# EAGLE board Parallel CS Prototype V2 pick & place ident (EAGLE 7.2.0), part 1 of 2
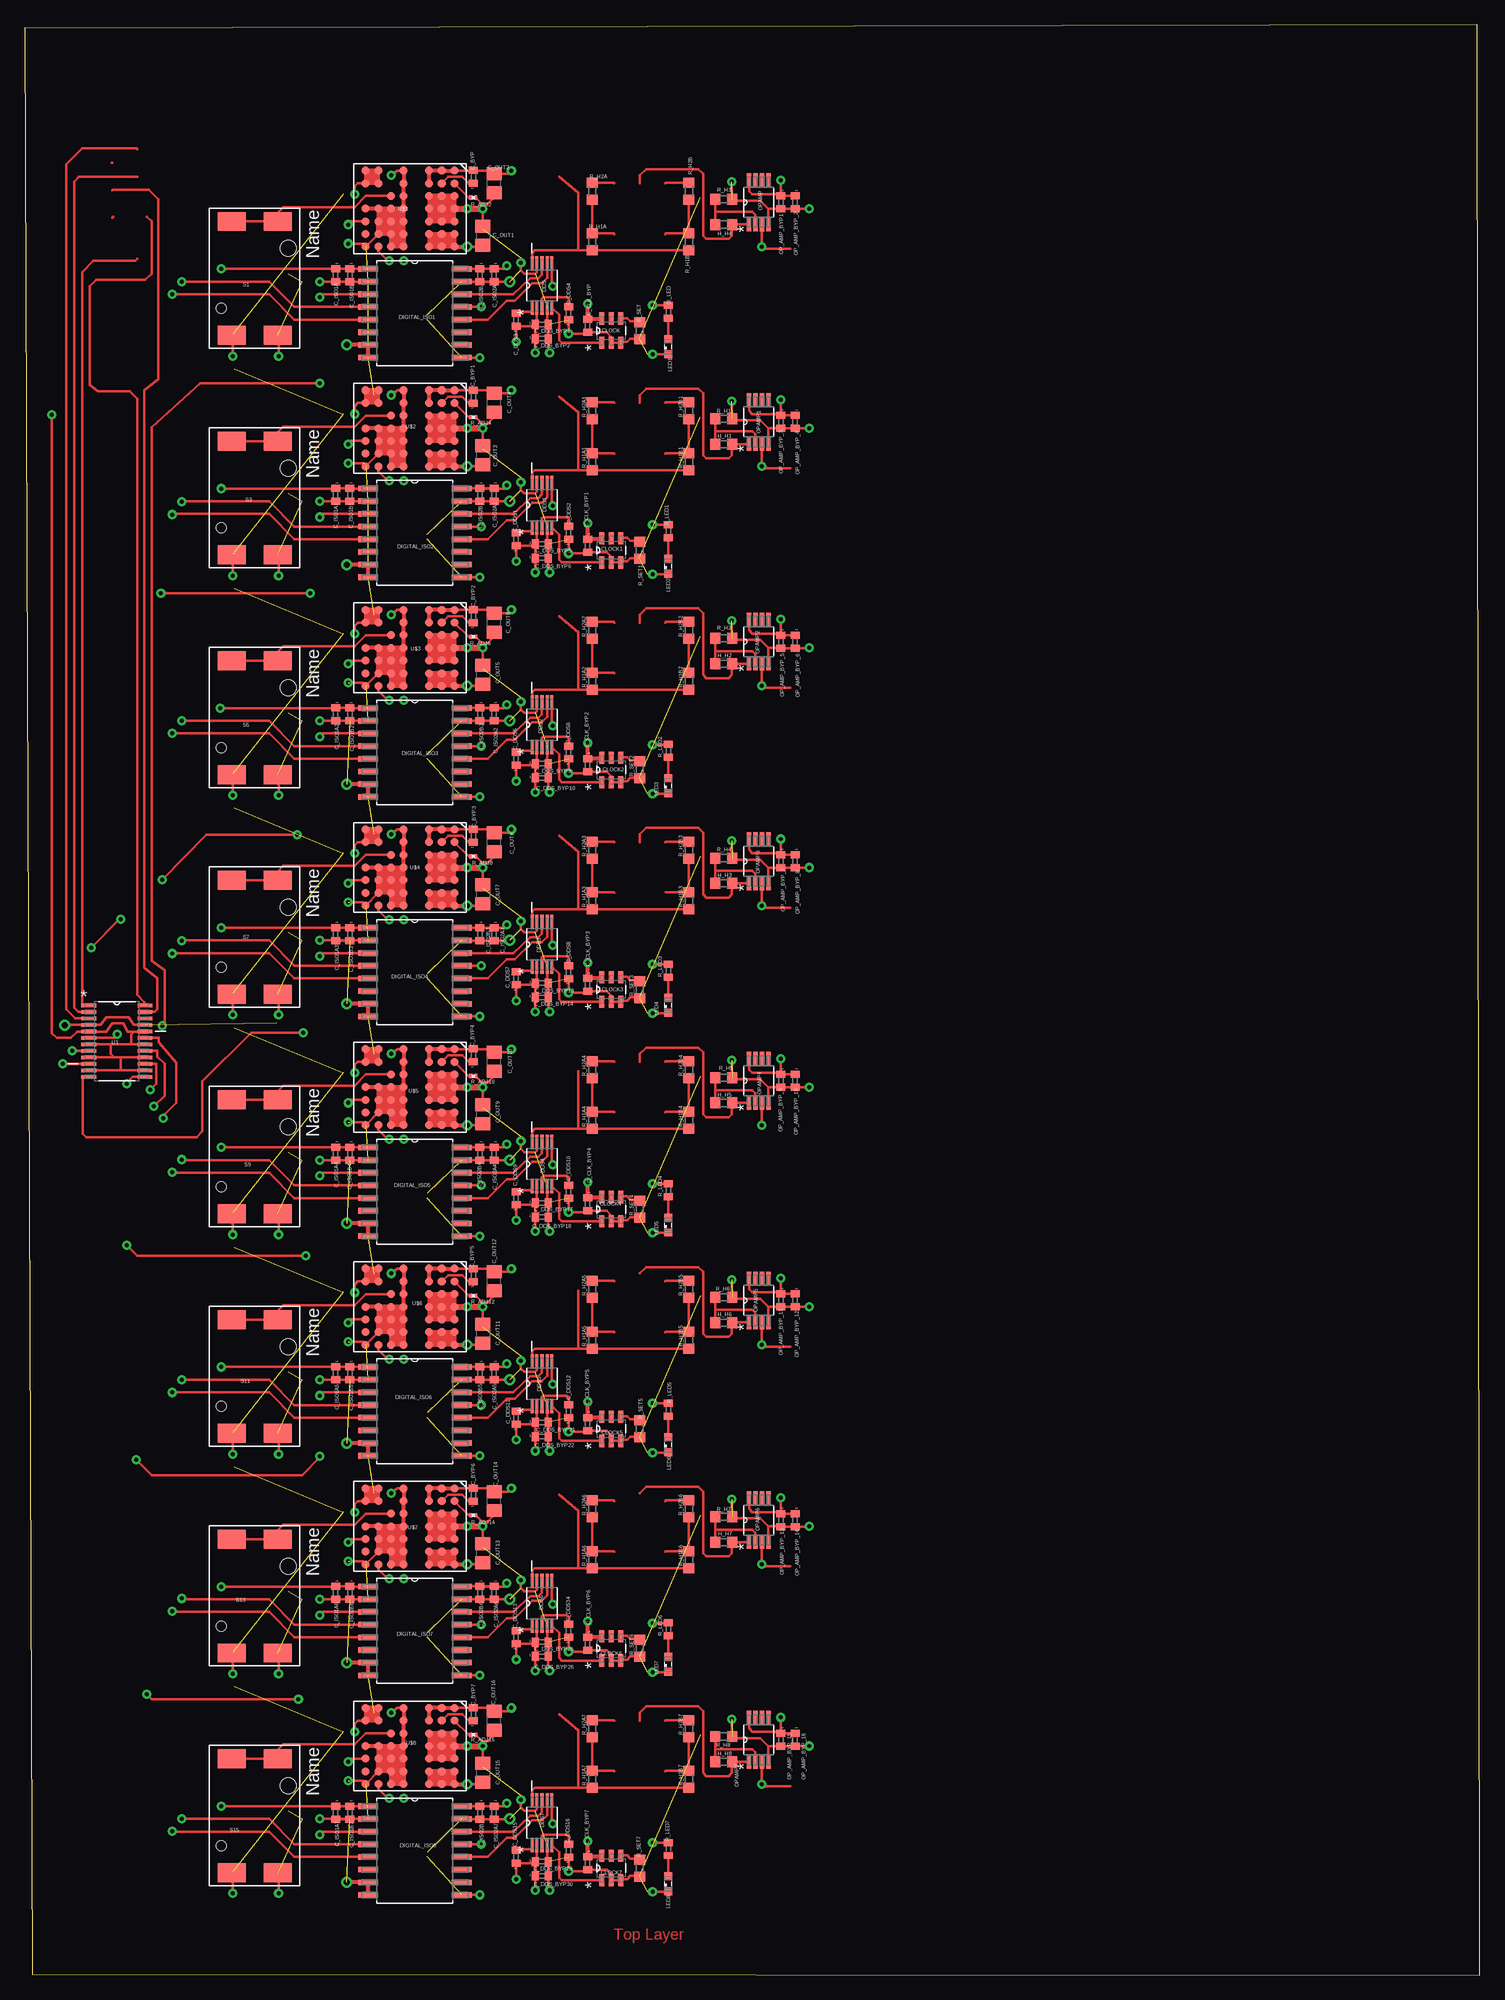
[diagram p0: board, top side]
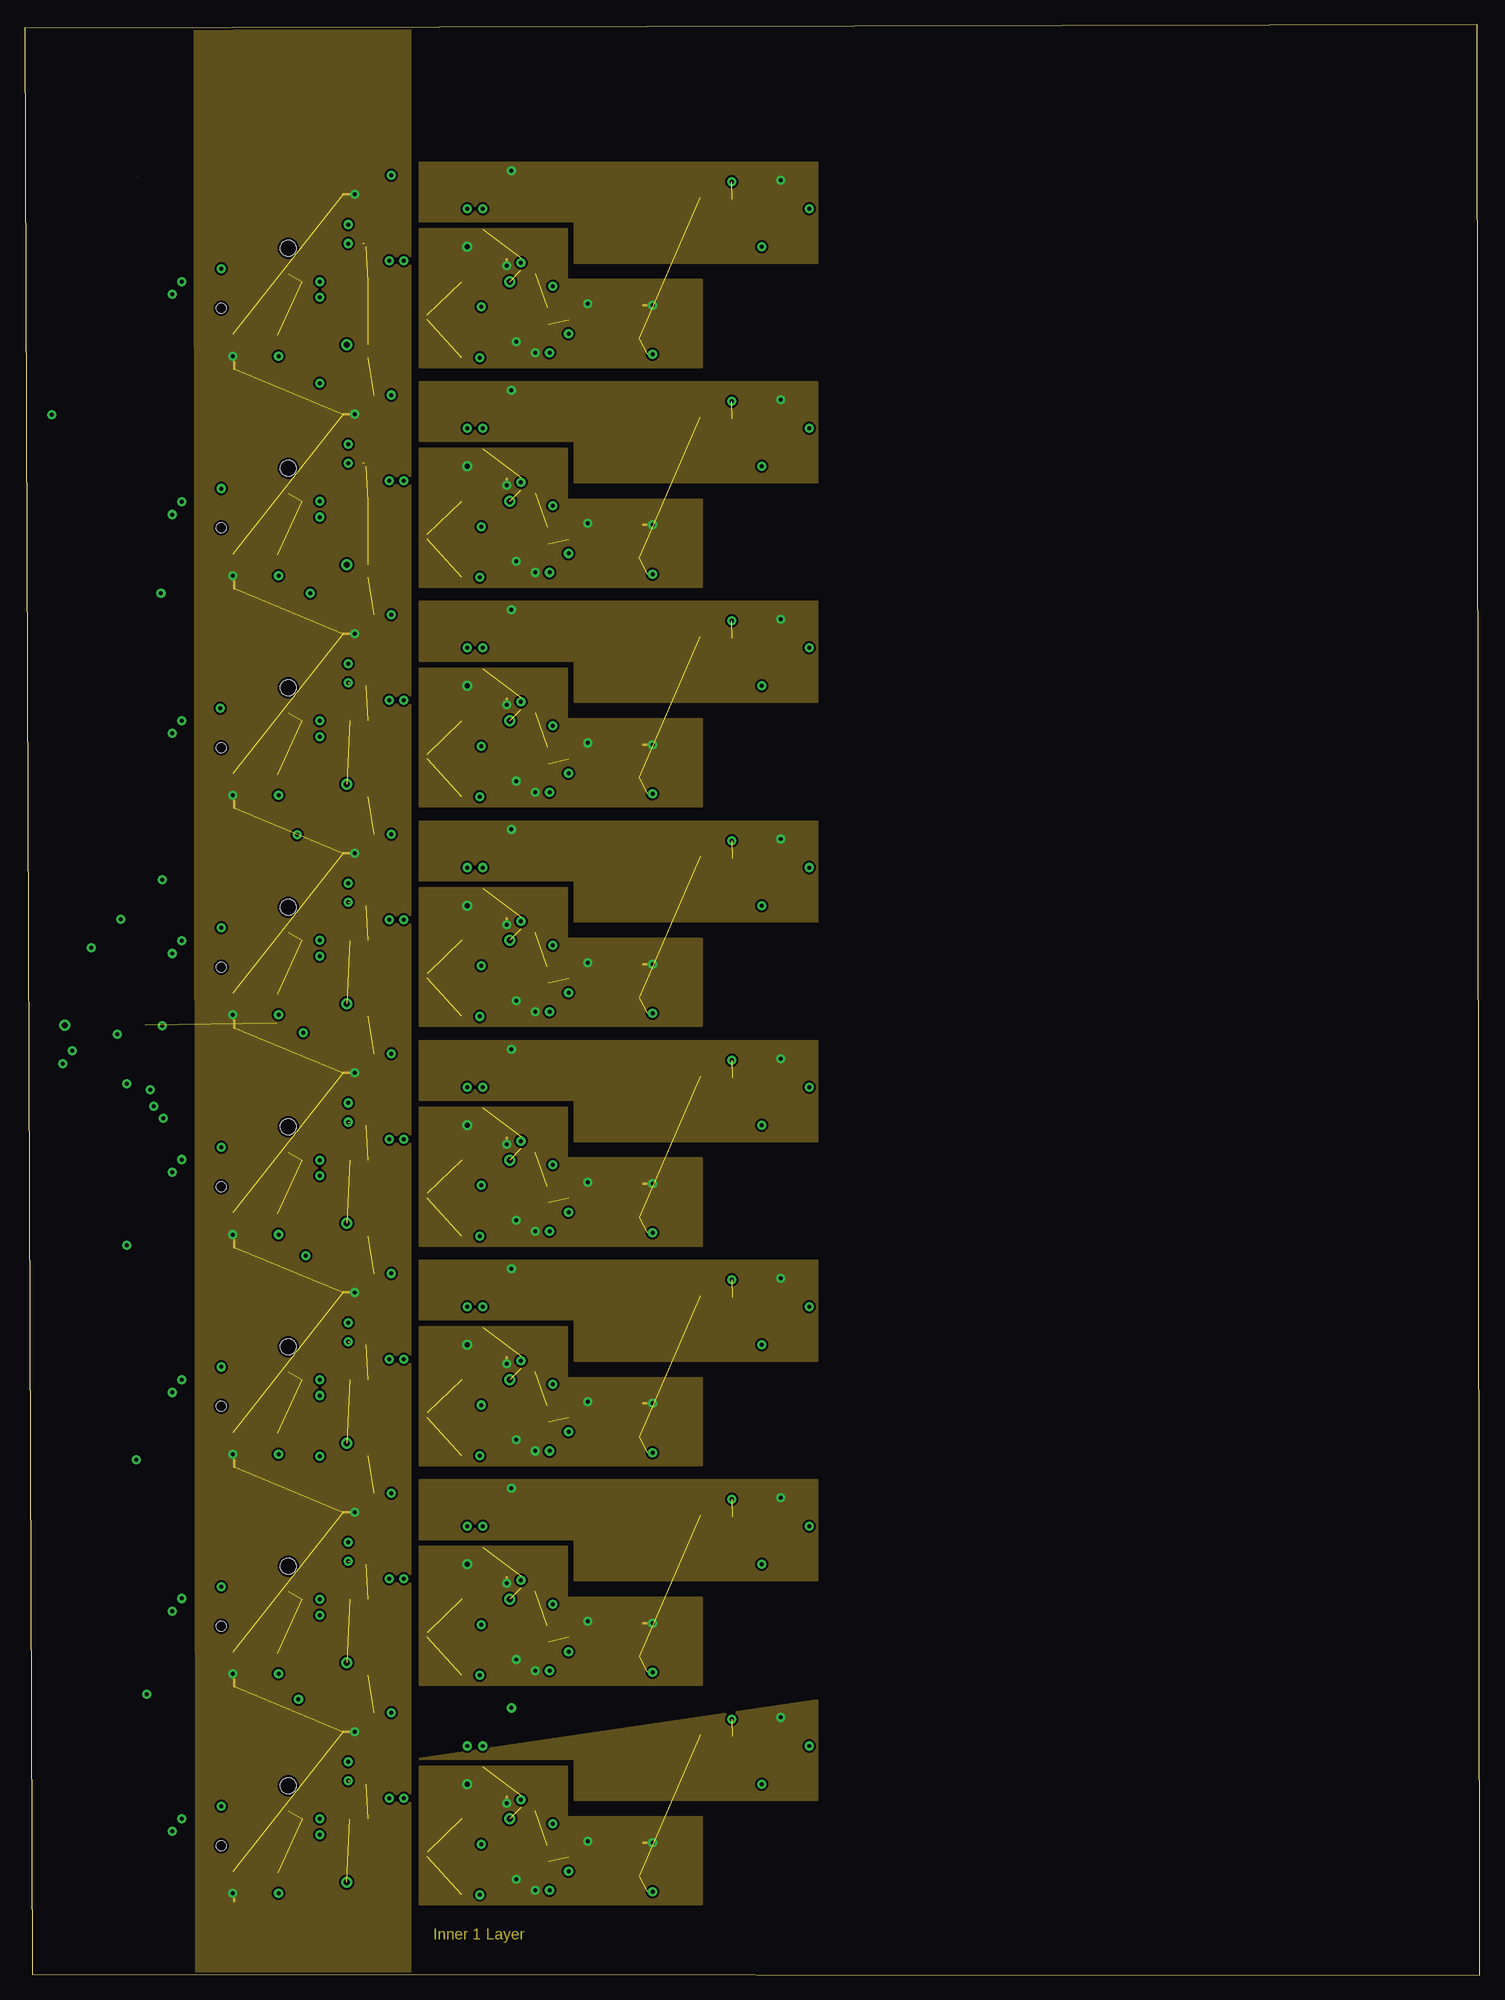
[diagram p1: board, inner layer Vdd]
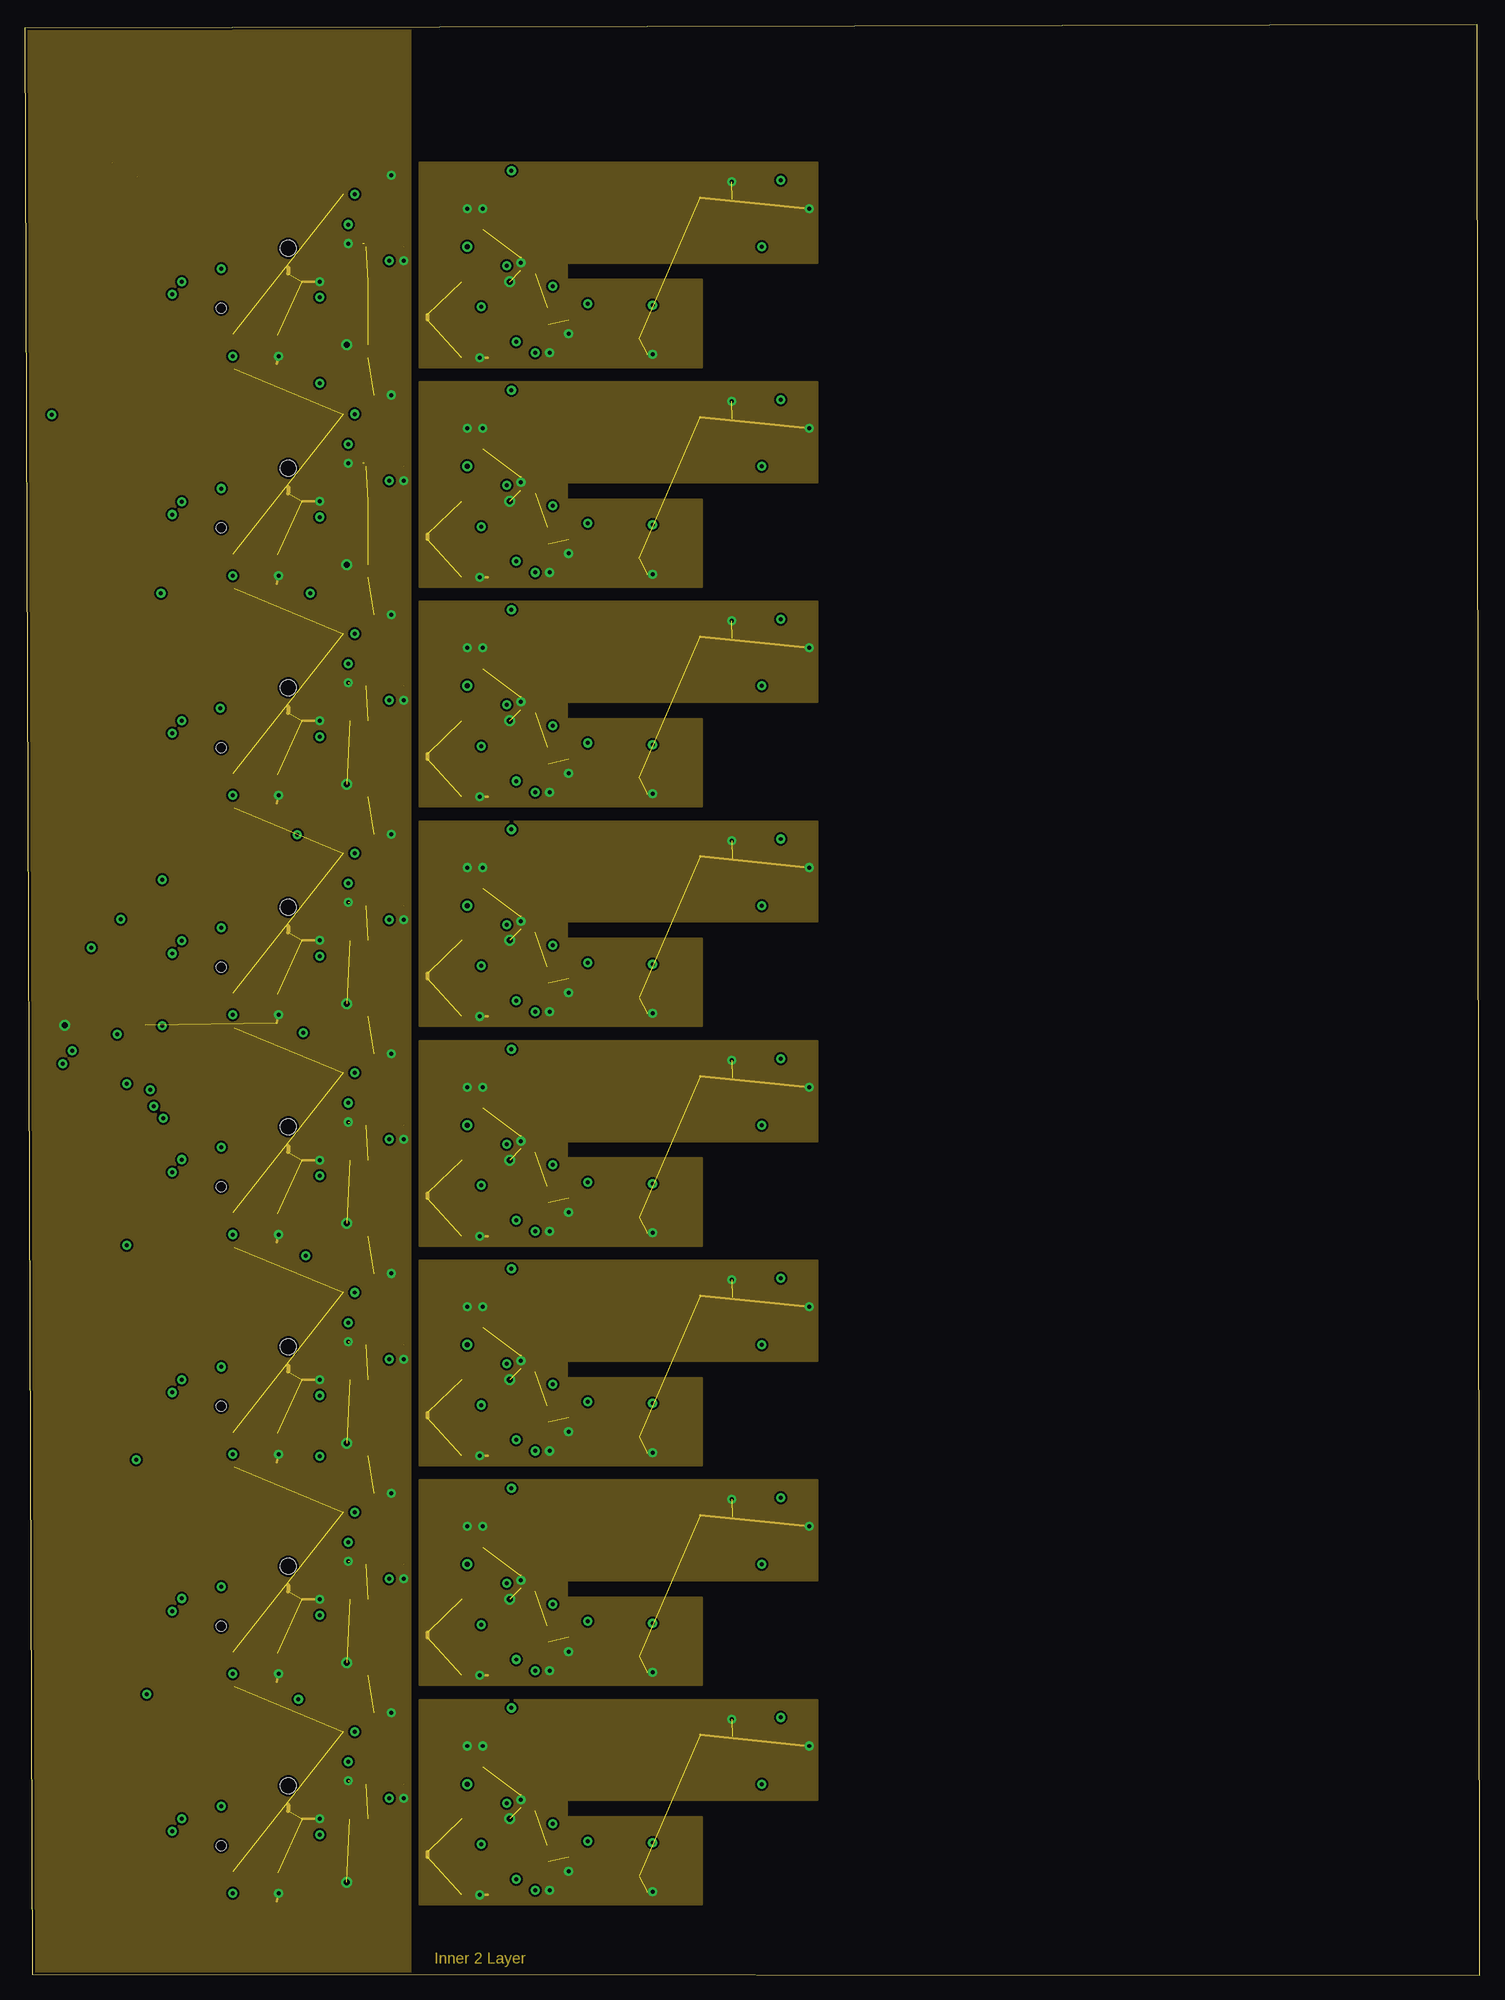
[diagram p2: board, inner layer Gnd]
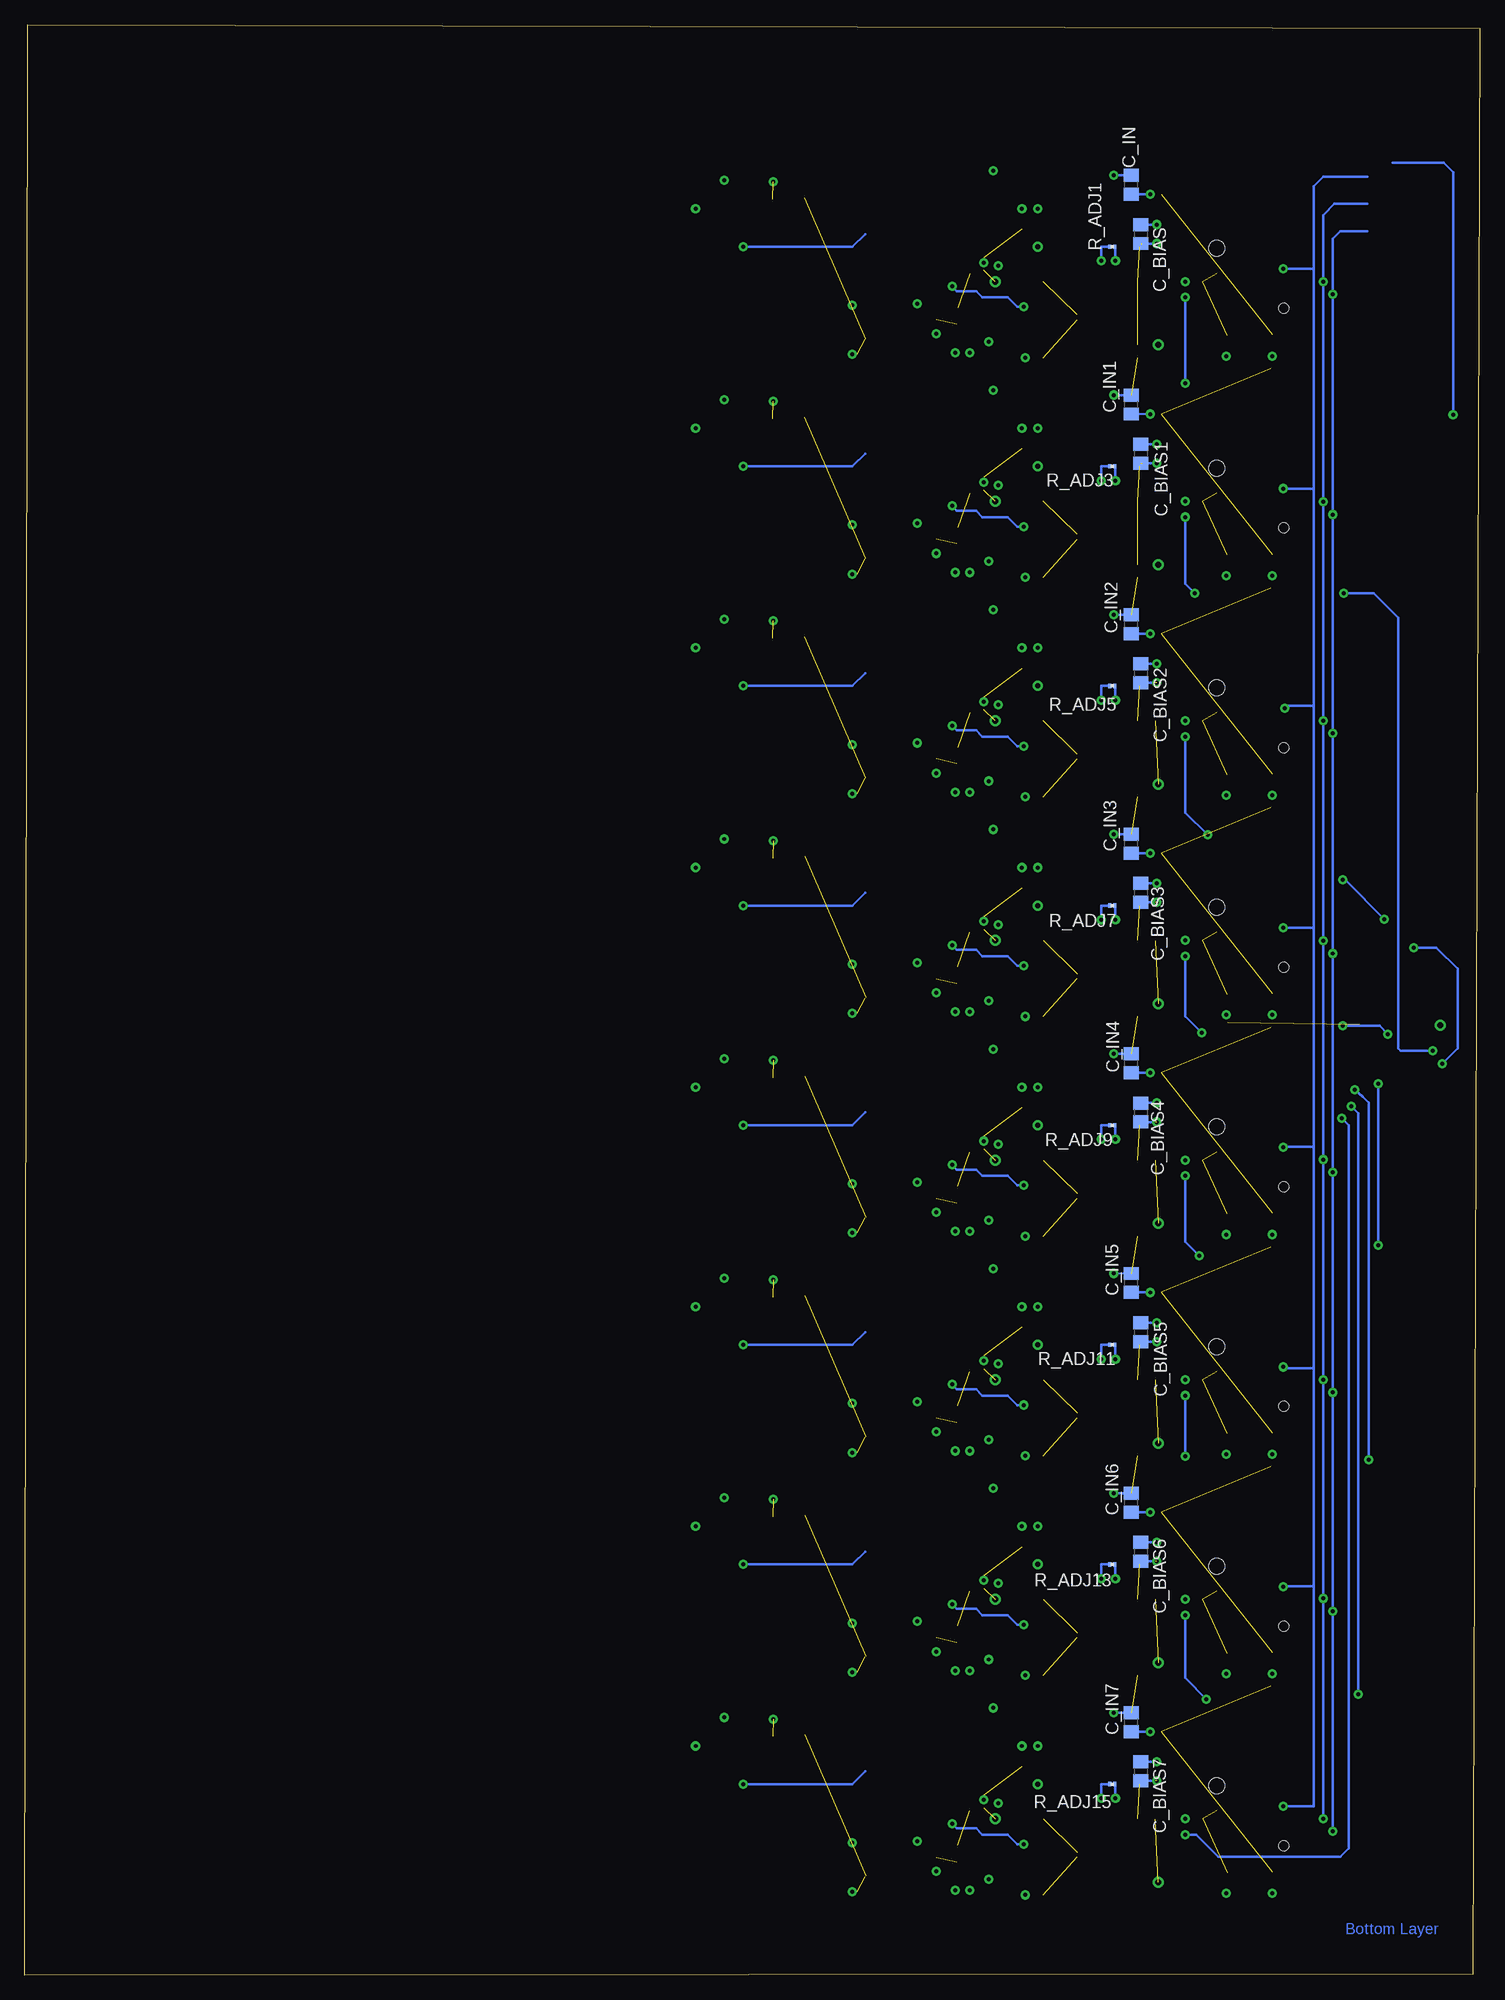
[diagram p3: board, bottom side, seen from below]

Size 145.75 x 195.35 mm. Coordinates in mm from the lower left corner, seen from the top.
Outline: 0.72,0.08 145.75,0 145.46,195.35 0,195.03 0.72,0.08
Copper layers (1*16): Top 0.035mm / dielectric 1.5mm / Bottom 0.035mm
Design rules "pcbtrain": minimum track width 0.2mm, minimum drill 0.4mm, track to track 0.2mm, track to pad 0.2mm, pad to pad 0.2mm, via to via 0.2mm, smd to smd 0mil, copper to edge 10mil, drill to drill 0.2mm, minimum pad ring 10mil, minimum via ring 10mil, stop-mask expansion 0.125mm, vias tented up to drill 0mil, thermal gap 10mil

## Footprints (pad centres in the part's own frame; a part is rotated, then mirrored left to right if it is on the bottom)
C0805 = smd 1.3 x 1.5: 1 -0.95,0; 2 0.95,0
C0402 = smd 0.7 x 0.9: 1 -0.65,0; 2 0.65,0
SOT95P280X100-6N = smd 1.219 x 0.508: 1 -1.219,0.94; 2 -1.219,0; 3 -1.219,-0.94; 4 1.219,-0.94; 5 1.219,0; 6 1.219,0.94
SOP50P490X110-10N = smd 1.422 x 0.305: 1 -2.235,0.991; 2 -2.235,0.508; 3 -2.235,0; 4 -2.235,-0.508; 5 -2.235,-0.991; 6 2.235,-0.991; 7 2.235,-0.508; 8 2.235,0; 9 2.235,0.508; 10 2.235,0.991
SOIC127P1032X265-16N = smd 1.981 x 0.559: 1 -4.699,4.445; 2 -4.699,3.175; 3 -4.699,1.905; 4 -4.699,0.635; 5 -4.699,-0.635; 6 -4.699,-1.905; 7 -4.699,-3.175; 8 -4.699,-4.445; 9 4.699,-4.445; 10 4.699,-3.175; 11 4.699,-1.905; 12 4.699,-0.635; 13 4.699,0.635; 14 4.699,1.905; 15 4.699,3.175; 16 4.699,4.445
R0603 = smd 1 x 1.1: 1 -0.85,0; 2 0.85,0
LED_SML0603 = smd 0.8 x 0.8: A 0.75,0; C -0.75,0
SOP65P490X109-8N = smd 1.372 x 0.457: 1 -2.21,0.965; 2 -2.21,0.33; 3 -2.21,-0.33; 4 -2.21,-0.965; 5 2.21,-0.965; 6 2.21,-0.33; 7 2.21,0.33; 8 2.21,0.965
R0201 = smd 0.28 x 0.43: 1 -0.255,0; 2 0.255,0
R0402 = smd 0.7 x 0.9: 1 -0.65,0; 2 0.65,0
PVB4-EE = smd 1.9 x 2.8: 1 5.7,2.3; 2@1 -5.7,2.3; 2@2 -5.7,-2.3; 3 5.7,-2.3 | hole 1.6: -3,3.35 | hole 1: 3,-3.35
SOP65P640X120-24N = smd 1.473 x 0.356: 1 -2.819,3.581; 2 -2.819,2.921; 3 -2.819,2.286; 4 -2.819,1.626; 5 -2.819,0.965; 6 -2.819,0.33; 7 -2.819,-0.33; 8 -2.819,-0.965; 9 -2.819,-1.626; 10 -2.819,-2.286; 11 -2.819,-2.921; 12 -2.819,-3.581; 13 2.819,-3.581; 14 2.819,-2.921; 15 2.819,-2.286; 16 2.819,-1.626; 17 2.819,-0.965; 18 2.819,-0.33; 19 2.819,0.33; 20 2.819,0.965; 21 2.819,1.626; 22 2.819,2.286; 23 2.819,2.921; 24 2.819,3.581
BGA-49 = smd 0.78 x 0.78: ADJ1 3.81,-3.175; ADJ2 -2.54,4.445; BIAS 1.27,-4.445; BYP -2.54,3.175; GND@1 -3.81,-0.635; GND@2 -2.54,-0.635; GND@3 -1.27,-0.635; GND@4 0,-0.635; GND@5 1.27,-0.635; GND@6 2.54,-0.635; GND@7 3.81,-0.635; GND@8 0,-1.905; GND@9 1.27,-1.905; GND@10 2.54,-1.905; GND@11 3.81,-1.905; GND@12 0,-3.175; GND@13 1.27,-3.175; GND@14 2.54,-3.175; GND@15 0,-4.445; GND@16 3.81,-4.445; RUN -1.27,-1.905; SS 2.54,-4.445; VIN@1 -3.81,-3.175; VIN@2 -2.54,-3.175; VIN@3 -3.81,-4.445; VIN@4 -2.54,-4.445; VOUT1@1 2.54,4.445; VOUT1@2 2.54,3.175; VOUT1@3 2.54,1.905; VOUT1@4 3.81,4.445; VOUT1@5 3.81,3.175; VOUT1@6 3.81,1.905; VOUT2@1 -3.81,4.445; VOUT2@2 -3.81,3.175; VOUT2@3 -3.81,1.905; VOUT2@4 -2.54,1.905; VOUT-@1 -1.27,4.445; VOUT-@2 -1.27,3.175; VOUT-@3 -1.27,1.905; VOUT-@4 0,4.445; VOUT-@5 0,3.175; VOUT-@6 0,1.905; VOUT-@7 1.27,4.445; VOUT-@8 1.27,3.175; VOUT-@9 1.27,1.905

## Placement (x,y rotation side)
C_BIAS  4.7u  [C0805]  33.97,174.4 270 bottom
C_BIAS1  4.7u  [C0805]  33.97,152.4 270 bottom
C_BIAS2  4.7u  [C0805]  33.97,130.4 270 bottom
C_BIAS3  4.7u  [C0805]  33.97,108.4 270 bottom
C_BIAS4  4.7u  [C0805]  33.97,86.4 270 bottom
C_BIAS5  4.7u  [C0805]  33.97,64.4 270 bottom
C_BIAS6  4.7u  [C0805]  33.97,42.4 270 bottom
C_BIAS7  4.7u  [C0805]  33.97,20.4 270 bottom
C_BYP  10n  [C0402]  44.93,180.12 90 top
C_BYP1  10n  [C0402]  44.93,158.12 90 top
C_BYP2  10n  [C0402]  44.93,136.12 90 top
C_BYP3  10n  [C0402]  44.93,114.12 90 top
C_BYP4  10n  [C0402]  44.93,92.12 90 top
C_BYP5  10n  [C0402]  44.93,70.12 90 top
C_BYP6  10n  [C0402]  44.93,48.12 90 top
C_BYP7  10n  [C0402]  44.93,26.12 90 top
C_CLK_BYP  0.1u  [C0402]  56.36,165.2 270 top
C_CLK_BYP1  0.1u  [C0402]  56.36,143.2 270 top
C_CLK_BYP2  0.1u  [C0402]  56.36,121.2 270 top
C_CLK_BYP3  0.1u  [C0402]  56.36,99.2 270 top
C_CLK_BYP4  0.1u  [C0402]  56.36,77.2 270 top
C_CLK_BYP5  0.1u  [C0402]  56.36,55.2 270 top
C_CLK_BYP6  0.1u  [C0402]  56.36,33.2 270 top
C_CLK_BYP7  0.1u  [C0402]  56.36,11.2 270 top
C_DDS1  10n  [C0402]  49.21,143.83 90 top
C_DDS2  100n  [C0402]  54.45,144.47 90 top
C_DDS3  10n  [C0402]  49.21,165.83 90 top
C_DDS4  100n  [C0402]  54.45,166.47 90 top
C_DDS5  10n  [C0402]  49.21,121.83 90 top
C_DDS6  100n  [C0402]  54.45,122.47 90 top
C_DDS7  10n  [C0402]  49.21,99.83 90 top
C_DDS8  100n  [C0402]  54.45,100.47 90 top
C_DDS9  10n  [C0402]  49.21,77.83 90 top
C_DDS10  100n  [C0402]  54.45,78.47 90 top
C_DDS11  10n  [C0402]  49.21,55.83 90 top
C_DDS12  100n  [C0402]  54.45,56.47 90 top
C_DDS13  10n  [C0402]  49.21,33.83 90 top
C_DDS14  100n  [C0402]  54.45,34.47 90 top
C_DDS15  10n  [C0402]  49.21,11.83 90 top
C_DDS16  100n  [C0402]  54.45,12.47 90 top
C_DDS_BYP1  0.1u  [C0402]  51.75,165.35 0 top
C_DDS_BYP2  10u  [C0402]  51.75,163.93 0 top
C_DDS_BYP5  0.1u  [C0402]  51.75,143.35 0 top
C_DDS_BYP6  10u  [C0402]  51.75,141.93 0 top
C_DDS_BYP9  0.1u  [C0402]  51.75,121.35 0 top
C_DDS_BYP10  10u  [C0402]  51.75,119.93 0 top
C_DDS_BYP13  0.1u  [C0402]  51.75,99.35 0 top
C_DDS_BYP14  10u  [C0402]  51.75,97.93 0 top
C_DDS_BYP17  0.1u  [C0402]  51.75,77.35 0 top
C_DDS_BYP18  10u  [C0402]  51.75,75.93 0 top
C_DDS_BYP21  0.1u  [C0402]  51.75,55.35 0 top
C_DDS_BYP22  10u  [C0402]  51.75,53.93 0 top
C_DDS_BYP25  0.1u  [C0402]  51.75,33.35 0 top
C_DDS_BYP26  10u  [C0402]  51.75,31.93 0 top
C_DDS_BYP29  0.1u  [C0402]  51.75,11.35 0 top
C_DDS_BYP30  10u  [C0402]  51.75,9.93 0 top
C_IN  2.2u  [C0805]  34.92,179.32 90 bottom
C_IN1  2.2u  [C0805]  34.92,157.32 90 bottom
C_IN2  2.2u  [C0805]  34.92,135.32 90 bottom
C_IN3  2.2u  [C0805]  34.92,113.32 90 bottom
C_IN4  2.2u  [C0805]  34.92,91.32 90 bottom
C_IN5  2.2u  [C0805]  34.92,69.33 90 bottom
C_IN6  2.2u  [C0805]  34.92,47.33 90 bottom
C_IN7  2.2u  [C0805]  34.92,25.33 90 bottom
C_ISO1A  1u  [C0402]  31.12,170.28 270 top
C_ISO1A1  1u  [C0402]  31.12,148.28 270 top
C_ISO1A2  1u  [C0402]  31.12,126.28 270 top
C_ISO1A3  1u  [C0402]  31.12,104.28 270 top
C_ISO1A4  1u  [C0402]  31.12,82.28 270 top
C_ISO1A5  1u  [C0402]  31.12,60.28 270 top
C_ISO1A6  1u  [C0402]  31.12,38.28 270 top
C_ISO1A7  1u  [C0402]  31.12,16.28 270 top
C_ISO1B  0.1u  [C0402]  32.54,170.28 270 top
C_ISO1B1  0.1u  [C0402]  32.54,148.28 270 top
C_ISO1B2  0.1u  [C0402]  32.54,126.28 270 top
C_ISO1B3  0.1u  [C0402]  32.54,104.28 270 top
C_ISO1B4  0.1u  [C0402]  32.54,82.28 270 top
C_ISO1B5  0.1u  [C0402]  32.54,60.28 270 top
C_ISO1B6  0.1u  [C0402]  32.54,38.28 270 top
C_ISO1B7  0.1u  [C0402]  32.54,16.28 270 top
C_ISO2A  1u  [C0402]  46.99,170.28 270 top
C_ISO2A1  1u  [C0402]  46.99,148.28 270 top
C_ISO2A2  1u  [C0402]  46.99,126.28 270 top
C_ISO2A3  1u  [C0402]  46.99,104.28 270 top
C_ISO2A4  1u  [C0402]  46.99,82.28 270 top
C_ISO2A5  1u  [C0402]  46.99,60.28 270 top
C_ISO2A6  1u  [C0402]  46.99,38.28 270 top
C_ISO2A7  1u  [C0402]  46.99,16.28 270 top
C_ISO2B  0.1u  [C0402]  45.56,170.28 270 top
C_ISO2B1  0.1u  [C0402]  45.56,148.28 270 top
C_ISO2B2  0.1u  [C0402]  45.56,126.28 270 top
C_ISO2B3  0.1u  [C0402]  45.56,104.28 270 top
C_ISO2B4  0.1u  [C0402]  45.56,82.28 270 top
C_ISO2B5  0.1u  [C0402]  45.56,60.28 270 top
C_ISO2B6  0.1u  [C0402]  45.56,38.28 270 top
C_ISO2B7  0.1u  [C0402]  45.56,16.28 270 top
C_OUT1  47u  [C0805]  45.88,174.25 270 top
C_OUT2  10u  [C0805]  46.99,179.48 90 top
C_OUT3  47u  [C0805]  45.88,152.25 270 top
C_OUT4  10u  [C0805]  46.99,157.48 90 top
C_OUT5  47u  [C0805]  45.88,130.25 270 top
C_OUT6  10u  [C0805]  46.99,135.48 90 top
C_OUT7  47u  [C0805]  45.88,108.25 270 top
C_OUT8  10u  [C0805]  46.99,113.48 90 top
C_OUT9  47u  [C0805]  45.88,86.25 270 top
C_OUT10  10u  [C0805]  46.99,91.48 90 top
C_OUT11  47u  [C0805]  45.88,64.24 270 top
C_OUT12  10u  [C0805]  46.99,69.48 90 top
C_OUT13  47u  [C0805]  45.88,42.24 270 top
C_OUT14  10u  [C0805]  46.99,47.48 90 top
C_OUT15  47u  [C0805]  45.88,20.25 270 top
C_OUT16  10u  [C0805]  46.99,25.48 90 top
CLOCK  LTC69000  [SOT95P280X100-6N]  58.74,164.72 90 top
CLOCK1  LTC69000  [SOT95P280X100-6N]  58.74,142.72 90 top
CLOCK2  LTC69000  [SOT95P280X100-6N]  58.74,120.72 90 top
CLOCK3  LTC69000  [SOT95P280X100-6N]  58.74,98.72 90 top
CLOCK4  LTC69000  [SOT95P280X100-6N]  58.74,76.72 90 top
CLOCK5  LTC69000  [SOT95P280X100-6N]  58.74,54.72 90 top
CLOCK6  LTC69000  [SOT95P280X100-6N]  58.74,32.72 90 top
CLOCK7  LTC69000  [SOT95P280X100-6N]  58.74,10.72 90 top
DDS  AD9833BRMZ  [SOP50P490X110-10N]  51.79,169.24 90 top
DDS1  AD9833BRMZ  [SOP50P490X110-10N]  51.79,147.24 90 top
DDS2  AD9833BRMZ  [SOP50P490X110-10N]  51.79,125.24 90 top
DDS3  AD9833BRMZ  [SOP50P490X110-10N]  51.79,103.24 90 top
DDS4  AD9833BRMZ  [SOP50P490X110-10N]  51.79,81.24 90 top
DDS5  AD9833BRMZ  [SOP50P490X110-10N]  51.79,59.24 90 top
DDS6  AD9833BRMZ  [SOP50P490X110-10N]  51.79,37.24 90 top
DDS7  AD9833BRMZ  [SOP50P490X110-10N]  51.79,15.24 90 top
DIGITAL_ISO1  ADUM1410ARWZ  [SOIC127P1032X265-16N]  39.05,166.47 0 top
DIGITAL_ISO2  ADUM1410ARWZ  [SOIC127P1032X265-16N]  39.05,144.47 0 top
DIGITAL_ISO3  ADUM1410ARWZ  [SOIC127P1032X265-16N]  39.05,122.47 0 top
DIGITAL_ISO4  ADUM1410ARWZ  [SOIC127P1032X265-16N]  39.05,100.47 0 top
DIGITAL_ISO5  ADUM1410ARWZ  [SOIC127P1032X265-16N]  39.05,78.47 0 top
DIGITAL_ISO6  ADUM1410ARWZ  [SOIC127P1032X265-16N]  39.05,56.47 0 top
DIGITAL_ISO7  ADUM1410ARWZ  [SOIC127P1032X265-16N]  39.05,34.47 0 top
DIGITAL_ISO8  ADUM1410ARWZ  [SOIC127P1032X265-16N]  39.05,12.47 0 top
H_H1  10k  [R0603]  70.01,153.36 0 top
H_H2  10k  [R0603]  70.01,131.36 0 top
H_H3  10k  [R0603]  70.01,109.36 0 top
H_H4  10k  [R0603]  70.01,175.36 0 top
H_H5  10k  [R0603]  70.01,87.36 0 top
H_H6  10k  [R0603]  70.01,65.36 0 top
H_H7  10k  [R0603]  70.01,43.36 0 top
H_H8  10k  [R0603]  70.01,21.36 0 top
LED1  [LED_SML0603]  64.45,163.13 90 top
LED2  [LED_SML0603]  64.45,141.13 90 top
LED3  [LED_SML0603]  64.45,119.13 90 top
LED4  [LED_SML0603]  64.45,97.13 90 top
LED5  [LED_SML0603]  64.45,75.13 90 top
LED6  [LED_SML0603]  64.45,53.13 90 top
LED7  [LED_SML0603]  64.45,31.13 90 top
LED8  [LED_SML0603]  64.45,9.13 90 top
OP_AMP_BYP1  0.1u  [C0402]  75.72,177.58 270 top
OP_AMP_BYP_2  10u  [C0402]  77.15,177.58 270 top
OP_AMP_BYP_3  0.1u  [C0402]  75.72,155.58 270 top
OP_AMP_BYP_4  10u  [C0402]  77.15,155.58 270 top
OP_AMP_BYP_5  0.1u  [C0402]  75.72,133.58 270 top
OP_AMP_BYP_6  10u  [C0402]  77.15,133.58 270 top
OP_AMP_BYP_7  0.1u  [C0402]  75.72,111.58 270 top
OP_AMP_BYP_8  10u  [C0402]  77.15,111.58 270 top
OP_AMP_BYP_9  0.1u  [C0402]  75.72,89.58 270 top
OP_AMP_BYP_10  10u  [C0402]  77.15,89.58 270 top
OP_AMP_BYP_11  0.1u  [C0402]  75.72,67.58 270 top
OP_AMP_BYP_12  10u  [C0402]  77.15,67.58 270 top
OP_AMP_BYP_13  0.1u  [C0402]  75.72,45.58 270 top
OP_AMP_BYP_14  10u  [C0402]  77.15,45.58 270 top
OP_AMP_BYP_15  0.1u  [C0402]  75.72,23.58 270 top
OP_AMP_BYP_16  10u  [C0402]  77.15,23.58 270 top
OPAMP  LMC6482IMM  [SOP65P490X109-8N]  73.5,177.58 90 top
OPAMP1  LMC6482IMM  [SOP65P490X109-8N]  73.5,155.58 90 top
OPAMP2  LMC6482IMM  [SOP65P490X109-8N]  73.5,133.58 90 top
OPAMP3  LMC6482IMM  [SOP65P490X109-8N]  73.5,111.58 90 top
OPAMP4  LMC6482IMM  [SOP65P490X109-8N]  73.5,89.58 90 top
OPAMP5  LMC6482IMM  [SOP65P490X109-8N]  73.5,67.58 90 top
OPAMP6  LMC6482IMM  [SOP65P490X109-8N]  73.5,45.58 90 top
OPAMP7  LMC6482IMM  [SOP65P490X109-8N]  73.5,23.58 90 top
R_ADJ1  6.8k  [R0201]  36.83,173.13 0 bottom
R_ADJ2  300k  [R0201]  44.93,178.06 0 top
R_ADJ3  6.8k  [R0201]  36.83,151.13 0 bottom
R_ADJ4  300k  [R0201]  44.93,156.06 0 top
R_ADJ5  6.8k  [R0201]  36.83,129.13 0 bottom
R_ADJ6  300k  [R0201]  44.93,134.06 0 top
R_ADJ7  6.8k  [R0201]  36.83,107.13 0 bottom
R_ADJ8  300k  [R0201]  44.93,112.06 0 top
R_ADJ9  6.8k  [R0201]  36.83,85.13 0 bottom
R_ADJ10  300k  [R0201]  44.93,90.06 0 top
R_ADJ11  6.8k  [R0201]  36.83,63.13 0 bottom
R_ADJ12  300k  [R0201]  44.93,68.05 0 top
R_ADJ13  6.8k  [R0201]  36.83,41.13 0 bottom
R_ADJ14  300k  [R0201]  44.93,46.05 0 top
R_ADJ15  6.8k  [R0201]  36.83,19.13 0 bottom
R_ADJ16  300k  [R0201]  44.93,24.05 0 top
R_H1  10k  [R0603]  70.01,155.9 180 top
R_H1A  10k  [R0603]  56.83,173.61 90 top
R_H1A1  10k  [R0603]  56.83,151.61 90 top
R_H1A2  10k  [R0603]  56.83,129.61 90 top
R_H1A3  10k  [R0603]  56.83,107.61 90 top
R_H1A4  10k  [R0603]  56.83,85.61 90 top
R_H1A5  10k  [R0603]  56.83,63.61 90 top
R_H1A6  10k  [R0603]  56.83,41.61 90 top
R_H1A7  10k  [R0603]  56.83,19.61 90 top
R_H1B  3.3k  [R0603]  66.52,173.61 90 top
R_H1B1  3.3k  [R0603]  66.52,151.61 90 top
R_H1B2  3.3k  [R0603]  66.52,129.61 90 top
R_H1B3  3.3k  [R0603]  66.52,107.61 90 top
R_H1B4  3.3k  [R0603]  66.52,85.61 90 top
R_H1B5  3.3k  [R0603]  66.52,63.61 90 top
R_H1B6  3.3k  [R0603]  66.52,41.61 90 top
R_H1B7  3.3k  [R0603]  66.52,19.61 90 top
R_H2  10k  [R0603]  70.01,133.9 180 top
R_H2A  10k  [R0603]  56.83,178.69 90 top
R_H2A1  10k  [R0603]  56.83,156.69 90 top
R_H2A2  10k  [R0603]  56.83,134.69 90 top
R_H2A3  10k  [R0603]  56.83,112.69 90 top
R_H2A4  10k  [R0603]  56.83,90.69 90 top
R_H2A5  10k  [R0603]  56.83,68.69 90 top
R_H2A6  10k  [R0603]  56.83,46.69 90 top
R_H2A7  10k  [R0603]  56.83,24.69 90 top
R_H2B  3.3k  [R0603]  66.52,178.69 90 top
R_H2B1  3.3k  [R0603]  66.52,156.69 90 top
R_H2B2  3.3k  [R0603]  66.52,134.69 90 top
R_H2B3  3.3k  [R0603]  66.52,112.69 90 top
R_H2B4  3.3k  [R0603]  66.52,90.69 90 top
R_H2B5  3.3k  [R0603]  66.52,68.69 90 top
R_H2B6  3.3k  [R0603]  66.52,46.69 90 top
R_H2B7  3.3k  [R0603]  66.52,24.69 90 top
R_H3  10k  [R0603]  70.01,177.9 180 top
R_H4  10k  [R0603]  70.01,111.9 180 top
R_H5  10k  [R0603]  70.01,89.9 180 top
R_H6  10k  [R0603]  70.01,67.9 180 top
R_H7  10k  [R0603]  70.01,45.9 180 top
R_H8  10k  [R0603]  70.01,23.9 180 top
R_LED  2700  [R0402]  64.45,166.62 90 top
R_LED1  2700  [R0402]  64.45,144.62 90 top
R_LED2  2700  [R0402]  64.45,122.62 90 top
R_LED3  2700  [R0402]  64.45,100.62 90 top
R_LED4  2700  [R0402]  64.45,78.62 90 top
R_LED5  2700  [R0402]  64.45,56.62 90 top
R_LED6  2700  [R0402]  64.45,34.62 90 top
R_LED7  2700  [R0402]  64.45,12.62 90 top
R_SET  20k  [R0603]  61.59,164.72 90 top
R_SET1  20k  [R0603]  61.59,142.72 90 top
R_SET2  20k  [R0603]  61.59,120.72 90 top
R_SET3  20k  [R0603]  61.59,98.72 90 top
R_SET4  20k  [R0603]  61.59,76.72 90 top
R_SET5  20k  [R0603]  61.59,54.72 90 top
R_SET6  20k  [R0603]  61.59,32.72 90 top
R_SET7  20k  [R0603]  61.59,10.72 90 top
S1  TL36POPVB4  [PVB4-EE]  23.02,169.96 270 top
S3  TL36POPVB4  [PVB4-EE]  23.02,147.96 270 top
S5  TL36POPVB4  [PVB4-EE]  23.02,125.96 270 top
S7  TL36POPVB4  [PVB4-EE]  23.02,103.96 270 top
S9  TL36POPVB4  [PVB4-EE]  23.02,81.96 270 top
S11  TL36POPVB4  [PVB4-EE]  23.02,59.96 270 top
S13  TL36POPVB4  [PVB4-EE]  23.02,37.96 270 top
S15  TL36POPVB4  [PVB4-EE]  23.02,15.96 270 top
U1  ADG714BRUZ  [SOP65P640X120-24N]  9.21,93.55 0 top
U$1  LTM8048  [BGA-49]  38.58,176.94 270 top
U$2  LTM8048  [BGA-49]  38.58,154.94 270 top
U$3  LTM8048  [BGA-49]  38.58,132.94 270 top
U$4  LTM8048  [BGA-49]  38.58,110.94 270 top
U$5  LTM8048  [BGA-49]  38.58,88.94 270 top
U$6  LTM8048  [BGA-49]  38.58,66.94 270 top
U$7  LTM8048  [BGA-49]  38.58,44.94 270 top
U$8  LTM8048  [BGA-49]  38.58,22.94 270 top

## Library data of the parts
C_BIAS C_BIAS1-C_BIAS7 C_BYP C_BYP1-C_BYP7 C_CLK_BYP C_CLK_BYP1-C_CLK_BYP7 C_DDS1-C_DDS16 C_DDS_BYP1 C_DDS_BYP2 C_DDS_BYP5 C_DDS_BYP6 C_DDS_BYP9 C_DDS_BYP10 C_DDS_BYP13 C_DDS_BYP14 C_DDS_BYP17 C_DDS_BYP18 C_DDS_BYP21 C_DDS_BYP22 C_DDS_BYP25 C_DDS_BYP26 C_DDS_BYP29 C_DDS_BYP30 C_IN C_IN1-C_IN7 C_ISO1A C_ISO1A1-C_ISO1A7 C_ISO1B C_ISO1B1-C_ISO1B7 C_ISO2A C_ISO2A1-C_ISO2A7 C_ISO2B C_ISO2B1-C_ISO2B7 C_OUT1-C_OUT16 H_H1-H_H8 OP_AMP_BYP1 OP_AMP_BYP_2-OP_AMP_BYP_16 R_ADJ1-R_ADJ16 R_H1 R_H1A R_H1A1-R_H1A7 R_H1B R_H1B1-R_H1B7 R_H2 R_H2A R_H2A1-R_H2A7 R_H2B R_H2B1-R_H2B7 R_H3-R_H8 R_LED R_LED1-R_LED7 R_SET R_SET1-R_SET7 = resistor
CLOCK CLOCK1-CLOCK7 = LTC6900; MPN: LTC6906IS6#PBF; OC_FARNELL: 1432109; OC_NEWARK: 10R6975; PACKAGE: TSOT-23-6; SUPPLIER: Linear Technology
DDS DDS1-DDS7 = ad9833; MPN: AD9833BRMZ; OC_FARNELL: 1581966; OC_NEWARK: 19M1014; PACKAGE: MSOP-10; SUPPLIER: Analog Devices
DIGITAL_ISO1-DIGITAL_ISO8 = SwitchBoard; MPN: ADUM1410ARWZ; OC_FARNELL: 2067770; OC_NEWARK: 73T8174; PACKAGE: 16-Lead SOIC_W; SUPPLIER: Analog Devices
LED1-LED8 = eagle-ltspice; SPICEMODEL: NONE; SPICEPREFIX: D; SPICETYPE: diode
OPAMP OPAMP1-OPAMP7 = LMC6482; MPN: LMC6482IMM; OC_FARNELL: 1468890; OC_NEWARK: 83F3826; PACKAGE: MSOP-8; SUPPLIER: NationalSemiconductor
S1 S3 S5 S7 S9 S11 S13 S15 = switch
U1 = SwitchBoard; MPN: ADG714BRUZ; OC_FARNELL: 9604367; OC_NEWARK: 59K1531; PACKAGE: TSSOP-24; SUPPLIER: Analog Devices
U$1-U$8 = LTM8048

## Nets
ARD_5V: C_ISO1A1.1 C_ISO1A2.1 C_ISO1A3.1 C_ISO1A4.1 C_ISO1A5.1 C_ISO1A6.1 C_ISO1A7.1 C_ISO1A.1 C_ISO1B1.1 C_ISO1B2.1 C_ISO1B3.1 C_ISO1B4.1 C_ISO1B5.1 C_ISO1B6.1 C_ISO1B7.1 C_ISO1B.1 DIGITAL_ISO1.1 DIGITAL_ISO2.1 DIGITAL_ISO3.1 DIGITAL_ISO4.1 DIGITAL_ISO5.1 DIGITAL_ISO6.1 DIGITAL_ISO7.1 DIGITAL_ISO8.1 U1.2
CLK_OUT: CLOCK.1 DDS.5
CLK_OUT1: CLOCK1.1 DDS1.5
CLK_OUT2: CLOCK2.1 DDS2.5
CLK_OUT3: CLOCK3.1 DDS3.5
CLK_OUT4: CLOCK4.1 DDS4.5
CLK_OUT5: CLOCK5.1 DDS5.5
CLK_OUT6: CLOCK6.1 DDS6.5
CLK_OUT7: CLOCK7.1 DDS7.5
COMP: C_DDS3.2 DDS.1
COMP1: C_DDS1.2 DDS1.1
COMP2: C_DDS5.2 DDS2.1
COMP3: C_DDS7.2 DDS3.1
COMP4: C_DDS9.2 DDS4.1
COMP5: C_DDS11.2 DDS5.1
COMP6: C_DDS13.2 DDS6.1
COMP7: C_DDS15.2 DDS7.1
FSYNC: DDS.8 DIGITAL_ISO1.14
FSYNC1: DDS1.8 DIGITAL_ISO2.14
FSYNC2: DDS2.8 DIGITAL_ISO3.14
FSYNC3: DDS3.8 DIGITAL_ISO4.14
FSYNC4: DDS4.8 DIGITAL_ISO5.14
FSYNC5: DDS5.8 DIGITAL_ISO6.14
FSYNC6: DDS6.8 DIGITAL_ISO7.14
FSYNC7: DDS7.8 DIGITAL_ISO8.14
FSYNC_ARD: U1.5 U1.7 U1.9 U1.11 U1.14 U1.16 U1.18 U1.20
FSYNC_IN: DIGITAL_ISO1.3 U1.6
FSYNC_IN1: DIGITAL_ISO2.3
FSYNC_IN2: DIGITAL_ISO3.3
FSYNC_IN3: DIGITAL_ISO4.3
FSYNC_IN4: DIGITAL_ISO5.3
FSYNC_IN5: DIGITAL_ISO6.3
FSYNC_IN6: DIGITAL_ISO7.3
FSYNC_IN7: DIGITAL_ISO8.3
GND: C_BIAS1.2 C_BIAS2.2 C_BIAS3.2 C_BIAS4.2 C_BIAS5.2 C_BIAS6.2 C_BIAS7.2 C_BIAS.2 C_IN1.2 C_IN2.2 C_IN3.2 C_IN4.2 C_IN5.2 C_IN6.2 C_IN7.2 C_IN.2 C_ISO1A1.2 C_ISO1A2.2 C_ISO1A3.2 C_ISO1A4.2 C_ISO1A5.2 C_ISO1A6.2 C_ISO1A7.2 C_ISO1A.2 C_ISO1B1.2 C_ISO1B2.2 C_ISO1B3.2 C_ISO1B4.2 C_ISO1B5.2 C_ISO1B6.2 C_ISO1B7.2 C_ISO1B.2 DIGITAL_ISO1.2 DIGITAL_ISO1.7 DIGITAL_ISO1.8 DIGITAL_ISO2.2 DIGITAL_ISO2.7 DIGITAL_ISO2.8 DIGITAL_ISO3.2 DIGITAL_ISO3.7 DIGITAL_ISO3.8 DIGITAL_ISO4.2 DIGITAL_ISO4.7 DIGITAL_ISO4.8 DIGITAL_ISO5.2 DIGITAL_ISO5.7 DIGITAL_ISO5.8 DIGITAL_ISO6.2 DIGITAL_ISO6.7 DIGITAL_ISO6.8 DIGITAL_ISO7.2 DIGITAL_ISO7.7 DIGITAL_ISO7.8 DIGITAL_ISO8.2 DIGITAL_ISO8.7 DIGITAL_ISO8.8 R_ADJ1.1 R_ADJ3.1 R_ADJ5.1 R_ADJ7.1 R_ADJ9.1 R_ADJ11.1 R_ADJ13.1 R_ADJ15.1 S1.1 S3.1 S5.1 S7.1 S9.1 S11.1 S13.1 S15.1 U1.21 U$1.GND@1 U$1.GND@2 U$1.GND@3 U$1.GND@4 U$1.GND@5 U$1.GND@6 U$1.GND@7 U$1.GND@8 U$1.GND@9 U$1.GND@10 U$1.GND@11 U$1.GND@12 U$1.GND@13 U$1.GND@14 U$1.GND@15 U$1.GND@16 U$2.GND@1 U$2.GND@2 U$2.GND@3 U$2.GND@4 U$2.GND@5 U$2.GND@6 U$2.GND@7 U$2.GND@8 U$2.GND@9 U$2.GND@10 U$2.GND@11 U$2.GND@12 U$2.GND@13 U$2.GND@14 U$2.GND@15 U$2.GND@16 U$3.GND@1 U$3.GND@2 U$3.GND@3 U$3.GND@4 U$3.GND@5 U$3.GND@6 U$3.GND@7 U$3.GND@8 U$3.GND@9 U$3.GND@10 U$3.GND@11 U$3.GND@12 U$3.GND@13 U$3.GND@14 U$3.GND@15 U$3.GND@16 U$4.GND@1 U$4.GND@2 U$4.GND@3 U$4.GND@4 U$4.GND@5 U$4.GND@6 U$4.GND@7 U$4.GND@8 U$4.GND@9 U$4.GND@10 U$4.GND@11 U$4.GND@12 U$4.GND@13 U$4.GND@14 U$4.GND@15 U$4.GND@16 U$5.GND@1 U$5.GND@2 U$5.GND@3 U$5.GND@4 U$5.GND@5 U$5.GND@6 U$5.GND@7 U$5.GND@8 U$5.GND@9 U$5.GND@10 U$5.GND@11 U$5.GND@12 U$5.GND@13 U$5.GND@14 U$5.GND@15 U$5.GND@16 U$6.GND@1 U$6.GND@2 U$6.GND@3 U$6.GND@4 U$6.GND@5 U$6.GND@6 U$6.GND@7 U$6.GND@8 U$6.GND@9 U$6.GND@10 U$6.GND@11 U$6.GND@12 U$6.GND@13 U$6.GND@14 U$6.GND@15 U$6.GND@16 U$7.GND@1 U$7.GND@2 U$7.GND@3 U$7.GND@4 U$7.GND@5 U$7.GND@6 U$7.GND@7 U$7.GND@8 U$7.GND@9 U$7.GND@10 U$7.GND@11 U$7.GND@12 U$7.GND@13 U$7.GND@14 U$7.GND@15 U$7.GND@16 U$8.GND@1 U$8.GND@2 U$8.GND@3 U$8.GND@4 U$8.GND@5 U$8.GND@6 U$8.GND@7 U$8.GND@8 U$8.GND@9 U$8.GND@10 U$8.GND@11 U$8.GND@12 U$8.GND@13 U$8.GND@14 U$8.GND@15 U$8.GND@16
GND_CS: C_CLK_BYP.2 C_DDS4.1 C_DDS_BYP1.2 C_DDS_BYP2.2 C_ISO2A.2 C_ISO2B.2 C_OUT1.1 C_OUT2.1 CLOCK.2 CLOCK.3 DDS.4 DDS.9 DIGITAL_ISO1.9 DIGITAL_ISO1.15 LED1.C OP_AMP_BYP1.2 OP_AMP_BYP_2.2 OPAMP.4 R_ADJ2.2 R_H3.1 R_SET.1 U$1.VOUT-@1 U$1.VOUT-@2 U$1.VOUT-@3 U$1.VOUT-@4 U$1.VOUT-@5 U$1.VOUT-@6 U$1.VOUT-@7 U$1.VOUT-@8 U$1.VOUT-@9
GND_CS1: C_CLK_BYP1.2 C_DDS2.1 C_DDS_BYP5.2 C_DDS_BYP6.2 C_ISO2A1.2 C_ISO2B1.2 C_OUT3.1 C_OUT4.1 CLOCK1.2 CLOCK1.3 DDS1.4 DDS1.9 DIGITAL_ISO2.9 DIGITAL_ISO2.15 LED2.C OP_AMP_BYP_3.2 OP_AMP_BYP_4.2 OPAMP1.4 R_ADJ4.2 R_H1.1 R_SET1.1 U$2.VOUT-@1 U$2.VOUT-@2 U$2.VOUT-@3 U$2.VOUT-@4 U$2.VOUT-@5 U$2.VOUT-@6 U$2.VOUT-@7 U$2.VOUT-@8 U$2.VOUT-@9
GND_CS2: C_CLK_BYP2.2 C_DDS6.1 C_DDS_BYP9.2 C_DDS_BYP10.2 C_ISO2A2.2 C_ISO2B2.2 C_OUT5.1 C_OUT6.1 CLOCK2.2 CLOCK2.3 DDS2.4 DDS2.9 DIGITAL_ISO3.9 DIGITAL_ISO3.15 LED3.C OP_AMP_BYP_5.2 OP_AMP_BYP_6.2 OPAMP2.4 R_ADJ6.2 R_H2.1 R_SET2.1 U$3.VOUT-@1 U$3.VOUT-@2 U$3.VOUT-@3 U$3.VOUT-@4 U$3.VOUT-@5 U$3.VOUT-@6 U$3.VOUT-@7 U$3.VOUT-@8 U$3.VOUT-@9
GND_CS3: C_CLK_BYP3.2 C_DDS8.1 C_DDS_BYP13.2 C_DDS_BYP14.2 C_ISO2A3.2 C_ISO2B3.2 C_OUT7.1 C_OUT8.1 CLOCK3.2 CLOCK3.3 DDS3.4 DDS3.9 DIGITAL_ISO4.9 DIGITAL_ISO4.15 LED4.C OP_AMP_BYP_7.2 OP_AMP_BYP_8.2 OPAMP3.4 R_ADJ8.2 R_H4.1 R_SET3.1 U$4.VOUT-@1 U$4.VOUT-@2 U$4.VOUT-@3 U$4.VOUT-@4 U$4.VOUT-@5 U$4.VOUT-@6 U$4.VOUT-@7 U$4.VOUT-@8 U$4.VOUT-@9
GND_CS4: C_CLK_BYP4.2 C_DDS10.1 C_DDS_BYP17.2 C_DDS_BYP18.2 C_ISO2A4.2 C_ISO2B4.2 C_OUT9.1 C_OUT10.1 CLOCK4.2 CLOCK4.3 DDS4.4 DDS4.9 DIGITAL_ISO5.9 DIGITAL_ISO5.15 LED5.C OP_AMP_BYP_9.2 OP_AMP_BYP_10.2 OPAMP4.4 R_ADJ10.2 R_H5.1 R_SET4.1 U$5.VOUT-@1 U$5.VOUT-@2 U$5.VOUT-@3 U$5.VOUT-@4 U$5.VOUT-@5 U$5.VOUT-@6 U$5.VOUT-@7 U$5.VOUT-@8 U$5.VOUT-@9
GND_CS5: C_CLK_BYP5.2 C_DDS12.1 C_DDS_BYP21.2 C_DDS_BYP22.2 C_ISO2A5.2 C_ISO2B5.2 C_OUT11.1 C_OUT12.1 CLOCK5.2 CLOCK5.3 DDS5.4 DDS5.9 DIGITAL_ISO6.9 DIGITAL_ISO6.15 LED6.C OP_AMP_BYP_11.2 OP_AMP_BYP_12.2 OPAMP5.4 R_ADJ12.2 R_H6.1 R_SET5.1 U$6.VOUT-@1 U$6.VOUT-@2 U$6.VOUT-@3 U$6.VOUT-@4 U$6.VOUT-@5 U$6.VOUT-@6 U$6.VOUT-@7 U$6.VOUT-@8 U$6.VOUT-@9
GND_CS6: C_CLK_BYP6.2 C_DDS14.1 C_DDS_BYP25.2 C_DDS_BYP26.2 C_ISO2A6.2 C_ISO2B6.2 C_OUT13.1 C_OUT14.1 CLOCK6.2 CLOCK6.3 DDS6.4 DDS6.9 DIGITAL_ISO7.9 DIGITAL_ISO7.15 LED7.C OP_AMP_BYP_13.2 OP_AMP_BYP_14.2 OPAMP6.4 R_ADJ14.2 R_H7.1 R_SET6.1 U$7.VOUT-@1 U$7.VOUT-@2 U$7.VOUT-@3 U$7.VOUT-@4 U$7.VOUT-@5 U$7.VOUT-@6 U$7.VOUT-@7 U$7.VOUT-@8 U$7.VOUT-@9
GND_CS7: C_CLK_BYP7.2 C_DDS16.1 C_DDS_BYP29.2 C_DDS_BYP30.2 C_ISO2A7.2 C_ISO2B7.2 C_OUT15.1 C_OUT16.1 CLOCK7.2 CLOCK7.3 DDS7.4 DDS7.9 DIGITAL_ISO8.9 DIGITAL_ISO8.15 LED8.C OP_AMP_BYP_15.2 OP_AMP_BYP_16.2 OPAMP7.4 R_ADJ16.2 R_H8.1 R_SET7.1 U$8.VOUT-@1 U$8.VOUT-@2 U$8.VOUT-@3 U$8.VOUT-@4 U$8.VOUT-@5 U$8.VOUT-@6 U$8.VOUT-@7 U$8.VOUT-@8 U$8.VOUT-@9
IOUT: OPAMP.3
IOUT1: OPAMP1.3
IOUT2: OPAMP2.3
IOUT3: OPAMP3.3
IOUT4: OPAMP4.3
IOUT5: OPAMP5.3
IOUT6: OPAMP6.3
IOUT7: OPAMP7.3
N$1: C_DDS4.2 DDS.3
N$2: C_BYP.1 U$1.BYP
N$3: S1.2@1 S1.2@2 U$1.RUN
N$6: LED1.A R_LED.1
N$7: R_H2A.2
N$8: CLOCK.4 R_SET.2
N$9: R_H2B.2
N$10: C_BIAS.1 U$1.BIAS
N$11: R_ADJ1.2 U$1.ADJ1
N$12: R_H1B.2 R_H2B.1
N$13: R_ADJ2.1 U$1.ADJ2
N$15: R_H1A.2 R_H2A.1
N$16: C_BIAS1.1 U$2.BIAS
N$17: R_ADJ3.2 U$2.ADJ1
N$18: R_ADJ4.1 U$2.ADJ2
N$19: C_BYP1.1 U$2.BYP
N$20: C_DDS2.2 DDS1.3
N$21: CLOCK1.4 R_SET1.2
N$22: R_H1B1.2 R_H2B1.1
N$23: S3.2@1 S3.2@2 U$2.RUN
N$24: LED2.A R_LED1.1
N$25: R_H2A1.2
N$26: R_H1A1.2 R_H2A1.1
N$27: R_H2B1.2
N$29: C_BIAS2.1 U$3.BIAS
N$30: R_ADJ5.2 U$3.ADJ1
N$31: R_ADJ6.1 U$3.ADJ2
N$32: C_BYP2.1 U$3.BYP
N$33: C_DDS6.2 DDS2.3
N$34: CLOCK2.4 R_SET2.2
N$35: R_H1B2.2 R_H2B2.1
N$36: S5.2@1 S5.2@2 U$3.RUN
N$37: LED3.A R_LED2.1
N$38: R_H2A2.2
N$39: R_H1A2.2 R_H2A2.1
N$40: R_H2B2.2
N$42: C_BIAS3.1 U$4.BIAS
N$43: R_ADJ7.2 U$4.ADJ1
N$44: R_ADJ8.1 U$4.ADJ2
N$45: C_BYP3.1 U$4.BYP
N$46: C_DDS8.2 DDS3.3
N$47: CLOCK3.4 R_SET3.2
N$48: R_H1B3.2 R_H2B3.1
N$49: S7.2@1 S7.2@2 U$4.RUN
N$50: LED4.A R_LED3.1
N$51: R_H2A3.2
N$52: R_H1A3.2 R_H2A3.1
N$53: R_H2B3.2
N$55: C_BIAS4.1 U$5.BIAS
N$56: R_ADJ9.2 U$5.ADJ1
N$57: R_ADJ10.1 U$5.ADJ2
N$58: C_BYP4.1 U$5.BYP
N$59: C_DDS10.2 DDS4.3
N$60: CLOCK4.4 R_SET4.2
N$61: R_H1B4.2 R_H2B4.1
N$62: S9.2@1 S9.2@2 U$5.RUN
N$63: LED5.A R_LED4.1
N$64: R_H2A4.2
N$65: R_H1A4.2 R_H2A4.1
N$66: R_H2B4.2
N$68: C_BIAS5.1 U$6.BIAS
N$69: R_ADJ11.2 U$6.ADJ1
N$70: R_ADJ12.1 U$6.ADJ2
N$71: C_BYP5.1 U$6.BYP
N$72: C_DDS12.2 DDS5.3
N$73: CLOCK5.4 R_SET5.2
N$74: R_H1B5.2 R_H2B5.1
N$75: S11.2@1 S11.2@2 U$6.RUN
N$76: LED6.A R_LED5.1
N$77: R_H2A5.2
N$78: R_H1A5.2 R_H2A5.1
N$79: R_H2B5.2
N$81: C_BIAS6.1 U$7.BIAS
N$82: R_ADJ13.2 U$7.ADJ1
N$83: R_ADJ14.1 U$7.ADJ2
N$84: C_BYP6.1 U$7.BYP
N$85: C_DDS14.2 DDS6.3
N$86: CLOCK6.4 R_SET6.2
N$87: R_H1B6.2 R_H2B6.1
N$88: S13.2@1 S13.2@2 U$7.RUN
N$89: LED7.A R_LED6.1
N$90: R_H2A6.2
N$91: R_H1A6.2 R_H2A6.1
N$92: R_H2B6.2
N$94: C_BIAS7.1 U$8.BIAS
N$95: R_ADJ15.2 U$8.ADJ1
N$96: R_ADJ16.1 U$8.ADJ2
N$97: C_BYP7.1 U$8.BYP
N$98: C_DDS16.2 DDS7.3
N$99: CLOCK7.4 R_SET7.2
N$100: R_H1B7.2 R_H2B7.1
N$101: S15.2@1 S15.2@2 U$8.RUN
N$102: LED8.A R_LED7.1
N$103: R_H2A7.2
N$104: R_H1A7.2 R_H2A7.1
N$105: R_H2B7.2
NEGA: H_H4.1 OPAMP.2 R_H3.2
NEGA1: H_H1.1 OPAMP1.2 R_H1.2
NEGA2: H_H2.1 OPAMP2.2 R_H2.2
NEGA3: H_H3.1 OPAMP3.2 R_H4.2
NEGA4: H_H5.1 OPAMP4.2 R_H5.2
NEGA5: H_H6.1 OPAMP5.2 R_H6.2
NEGA6: H_H7.1 OPAMP6.2 R_H7.2
NEGA7: H_H8.1 OPAMP7.2 R_H8.2
OP_OUTA: H_H4.2 OPAMP.1
OP_OUTA1: H_H1.2 OPAMP1.1
OP_OUTA2: H_H2.2 OPAMP2.1
OP_OUTA3: H_H3.2 OPAMP3.1
OP_OUTA4: H_H5.2 OPAMP4.1
OP_OUTA5: H_H6.2 OPAMP5.1
OP_OUTA6: H_H7.2 OPAMP6.1
OP_OUTA7: H_H8.2 OPAMP7.1
SCLK: DDS.7 DIGITAL_ISO1.12
SCLK1: DDS1.7 DIGITAL_ISO2.12
SCLK2: DDS2.7 DIGITAL_ISO3.12
SCLK3: DDS3.7 DIGITAL_ISO4.12
SCLK4: DDS4.7 DIGITAL_ISO5.12
SCLK5: DDS5.7 DIGITAL_ISO6.12
SCLK6: DDS6.7 DIGITAL_ISO7.12
SCLK7: DDS7.7 DIGITAL_ISO8.12
SCLK_IN: DIGITAL_ISO1.5 DIGITAL_ISO2.5 DIGITAL_ISO3.5 DIGITAL_ISO4.5 DIGITAL_ISO5.5 DIGITAL_ISO6.5 DIGITAL_ISO7.5 DIGITAL_ISO8.5
SDATA: DDS.6 DIGITAL_ISO1.13
SDATA1: DDS1.6 DIGITAL_ISO2.13
SDATA2: DDS2.6 DIGITAL_ISO3.13
SDATA3: DDS3.6 DIGITAL_ISO4.13
SDATA4: DDS4.6 DIGITAL_ISO5.13
SDATA5: DDS5.6 DIGITAL_ISO6.13
SDATA6: DDS6.6 DIGITAL_ISO7.13
SDATA7: DDS7.6 DIGITAL_ISO8.13
SDATA_IN: DIGITAL_ISO1.4 DIGITAL_ISO2.4 DIGITAL_ISO3.4 DIGITAL_ISO4.4 DIGITAL_ISO5.4 DIGITAL_ISO6.4 DIGITAL_ISO7.4 DIGITAL_ISO8.4
SW_DIN: U1.3
SW_SCLK: U1.1
SW_~RESET: U1.23
SW_~SYNC: U1.24
V_SINE: DDS.10 R_H1A.1 R_H1B.1
V_SINE1: DDS1.10 R_H1A1.1 R_H1B1.1
V_SINE2: DDS2.10 R_H1A2.1 R_H1B2.1
V_SINE3: DDS3.10 R_H1A3.1 R_H1B3.1
V_SINE4: DDS4.10 R_H1A4.1 R_H1B4.1
V_SINE5: DDS5.10 R_H1A5.1 R_H1B5.1
V_SINE6: DDS6.10 R_H1A6.1 R_H1B6.1
V_SINE7: DDS7.10 R_H1A7.1 R_H1B7.1
VDD: C_IN1.1 C_IN2.1 C_IN3.1 C_IN4.1 C_IN5.1 C_IN6.1 C_IN7.1 C_IN.1 S1.3 S3.3 S5.3 S7.3 S9.3 S11.3 S13.3 S15.3 U$1.VIN@1 U$1.VIN@2 U$1.VIN@3 U$1.VIN@4 U$2.VIN@1 U$2.VIN@2 U$2.VIN@3 U$2.VIN@4 U$3.VIN@1 U$3.VIN@2 U$3.VIN@3 U$3.VIN@4 U$4.VIN@1 U$4.VIN@2 U$4.VIN@3 U$4.VIN@4 U$5.VIN@1 U$5.VIN@2 U$5.VIN@3 U$5.VIN@4 U$6.VIN@1 U$6.VIN@2 U$6.VIN@3 U$6.VIN@4 U$7.VIN@1 U$7.VIN@2 U$7.VIN@3 U$7.VIN@4 U$8.VIN@1 U$8.VIN@2 U$8.VIN@3 U$8.VIN@4
VDD_CS_ANA: C_BYP.2 C_OUT2.2 OP_AMP_BYP1.1 OP_AMP_BYP_2.1 OPAMP.8 U$1.VOUT2@1 U$1.VOUT2@2 U$1.VOUT2@3 U$1.VOUT2@4
VDD_CS_ANA1: C_BYP1.2 C_OUT4.2 OP_AMP_BYP_3.1 OP_AMP_BYP_4.1 OPAMP1.8 U$2.VOUT2@1 U$2.VOUT2@2 U$2.VOUT2@3 U$2.VOUT2@4
VDD_CS_ANA2: C_BYP2.2 C_OUT6.2 OP_AMP_BYP_5.1 OP_AMP_BYP_6.1 OPAMP2.8 U$3.VOUT2@1 U$3.VOUT2@2 U$3.VOUT2@3 U$3.VOUT2@4
VDD_CS_ANA3: C_BYP3.2 C_OUT8.2 OP_AMP_BYP_7.1 OP_AMP_BYP_8.1 OPAMP3.8 U$4.VOUT2@1 U$4.VOUT2@2 U$4.VOUT2@3 U$4.VOUT2@4
VDD_CS_ANA4: C_BYP4.2 C_OUT10.2 OP_AMP_BYP_9.1 OP_AMP_BYP_10.1 OPAMP4.8 U$5.VOUT2@1 U$5.VOUT2@2 U$5.VOUT2@3 U$5.VOUT2@4
VDD_CS_ANA5: C_BYP5.2 C_OUT12.2 OP_AMP_BYP_11.1 OP_AMP_BYP_12.1 OPAMP5.8 U$6.VOUT2@1 U$6.VOUT2@2 U$6.VOUT2@3 U$6.VOUT2@4
VDD_CS_ANA6: C_BYP6.2 C_OUT14.2 OP_AMP_BYP_13.1 OP_AMP_BYP_14.1 OPAMP6.8 U$7.VOUT2@1 U$7.VOUT2@2 U$7.VOUT2@3 U$7.VOUT2@4
VDD_CS_ANA7: C_BYP7.2 C_OUT16.2 OP_AMP_BYP_15.1 OP_AMP_BYP_16.1 OPAMP7.8 U$8.VOUT2@1 U$8.VOUT2@2 U$8.VOUT2@3 U$8.VOUT2@4
VDD_CS_DIG: C_CLK_BYP.1 C_DDS3.1 C_DDS_BYP1.1 C_DDS_BYP2.1 C_ISO2A.1 C_ISO2B.1 C_OUT1.2 CLOCK.6 DDS.2 DIGITAL_ISO1.16 R_LED.2 U$1.VOUT1@1 U$1.VOUT1@2 U$1.VOUT1@3 U$1.VOUT1@4 U$1.VOUT1@5 U$1.VOUT1@6
VDD_CS_DIG1: C_CLK_BYP1.1 C_DDS1.1 C_DDS_BYP5.1 C_DDS_BYP6.1 C_ISO2A1.1 C_ISO2B1.1 C_OUT3.2 CLOCK1.6 DDS1.2 DIGITAL_ISO2.16 R_LED1.2 U$2.VOUT1@1 U$2.VOUT1@2 U$2.VOUT1@3 U$2.VOUT1@4 U$2.VOUT1@5 U$2.VOUT1@6
VDD_CS_DIG2: C_CLK_BYP2.1 C_DDS5.1 C_DDS_BYP9.1 C_DDS_BYP10.1 C_ISO2A2.1 C_ISO2B2.1 C_OUT5.2 CLOCK2.6 DDS2.2 DIGITAL_ISO3.16 R_LED2.2 U$3.VOUT1@1 U$3.VOUT1@2 U$3.VOUT1@3 U$3.VOUT1@4 U$3.VOUT1@5 U$3.VOUT1@6
VDD_CS_DIG3: C_CLK_BYP3.1 C_DDS7.1 C_DDS_BYP13.1 C_DDS_BYP14.1 C_ISO2A3.1 C_ISO2B3.1 C_OUT7.2 CLOCK3.6 DDS3.2 DIGITAL_ISO4.16 R_LED3.2 U$4.VOUT1@1 U$4.VOUT1@2 U$4.VOUT1@3 U$4.VOUT1@4 U$4.VOUT1@5 U$4.VOUT1@6
VDD_CS_DIG4: C_CLK_BYP4.1 C_DDS9.1 C_DDS_BYP17.1 C_DDS_BYP18.1 C_ISO2A4.1 C_ISO2B4.1 C_OUT9.2 CLOCK4.6 DDS4.2 DIGITAL_ISO5.16 R_LED4.2 U$5.VOUT1@1 U$5.VOUT1@2 U$5.VOUT1@3 U$5.VOUT1@4 U$5.VOUT1@5 U$5.VOUT1@6
VDD_CS_DIG5: C_CLK_BYP5.1 C_DDS11.1 C_DDS_BYP21.1 C_DDS_BYP22.1 C_ISO2A5.1 C_ISO2B5.1 C_OUT11.2 CLOCK5.6 DDS5.2 DIGITAL_ISO6.16 R_LED5.2 U$6.VOUT1@1 U$6.VOUT1@2 U$6.VOUT1@3 U$6.VOUT1@4 U$6.VOUT1@5 U$6.VOUT1@6
VDD_CS_DIG6: C_CLK_BYP6.1 C_DDS13.1 C_DDS_BYP25.1 C_DDS_BYP26.1 C_ISO2A6.1 C_ISO2B6.1 C_OUT13.2 CLOCK6.6 DDS6.2 DIGITAL_ISO7.16 R_LED6.2 U$7.VOUT1@1 U$7.VOUT1@2 U$7.VOUT1@3 U$7.VOUT1@4 U$7.VOUT1@5 U$7.VOUT1@6
VDD_CS_DIG7: C_CLK_BYP7.1 C_DDS15.1 C_DDS_BYP29.1 C_DDS_BYP30.1 C_ISO2A7.1 C_ISO2B7.1 C_OUT15.2 CLOCK7.6 DDS7.2 DIGITAL_ISO8.16 R_LED7.2 U$8.VOUT1@1 U$8.VOUT1@2 U$8.VOUT1@3 U$8.VOUT1@4 U$8.VOUT1@5 U$8.VOUT1@6

## Tracks (layer width: path | path; a pad name or v marks a point on that pad's centre or on a via)
ARD_5V  (via drill 0.4, 0.4 pad 0.25)  (1 unrouted)
  Top 0.254: U1.2 5.33,96.47 4.92,96.88 4.92,179.64 5.4,180.12 11.23,180.12 11.27,180.16 | DIGITAL_ISO1.1 32.56,170.91 C_ISO1B.1 C_ISO1A.1 31.1,170.91 v19.69,170.91 | DIGITAL_ISO8.1 32.56,16.91 C_ISO1B7.1 C_ISO1A7.1 31.1,16.91 v19.69,16.91 | DIGITAL_ISO7.1 32.56,38.91 C_ISO1B6.1 C_ISO1A6.1 31.1,38.91 v19.69,38.91 | DIGITAL_ISO6.1 32.56,60.91 C_ISO1B5.1 C_ISO1A5.1 31.1,60.91 v19.69,60.91 | DIGITAL_ISO5.1 32.56,82.91 C_ISO1B4.1 C_ISO1A4.1 31.1,82.91 v19.69,82.91 | DIGITAL_ISO4.1 32.56,104.91 C_ISO1B3.1 C_ISO1A3.1 31.1,104.91 v19.69,104.91 | DIGITAL_ISO3.1 32.56,126.91 C_ISO1B2.1 C_ISO1A2.1 v19.56,126.92 | DIGITAL_ISO2.1 32.56,148.91 C_ISO1B1.1 C_ISO1A1.1 31.1,148.91 v19.69,148.91
  Bottom 0.254: 16.67,170.91 16.67,179.17 15.72,180.12 11.32,180.12 11.27,180.16 | 16.67,170.91 16.67,148.91 | 16.67,148.91 16.67,127.15 | 16.67,127.15 16.67,104.91 | 16.67,104.91 16.67,82.98 | 16.67,82.98 16.67,60.77 | 16.67,60.77 16.67,38.92 | 16.67,38.92 16.67,16.95 16.67,16.92 16.67,16.91 v19.69,16.91 | v19.69,170.91 16.67,170.91 | v19.69,104.91 16.67,104.91 | v19.69,148.91 16.67,148.91 | v19.56,126.92 19.33,127.15 16.67,127.15 | v19.69,82.91 19.62,82.98 16.67,82.98 | v19.69,60.91 19.55,60.77 16.67,60.77 | v19.69,38.91 v19.67,38.92 16.67,38.92
CLK_OUT
  Top 0.254: DDS.5 53.5,166.29 53.5,163.77 53.77,163.5 CLOCK.1
CLK_OUT1
  Top 0.254: DDS1.5 53.5,144.29 53.5,141.77 53.77,141.5 CLOCK1.1
CLK_OUT2
  Top 0.254: DDS2.5 53.5,122.29 53.5,119.77 53.77,119.5 CLOCK2.1
CLK_OUT3
  Top 0.254: DDS3.5 53.5,100.29 53.5,97.77 53.77,97.5 CLOCK3.1
CLK_OUT4
  Top 0.254: DDS4.5 53.5,78.29 53.5,75.77 53.77,75.5 CLOCK4.1
CLK_OUT5
  Top 0.254: DDS5.5 53.5,56.29 53.5,53.77 53.77,53.5 CLOCK5.1
CLK_OUT6
  Top 0.254: DDS6.5 53.5,34.29 53.5,31.77 53.77,31.5 CLOCK6.1
CLK_OUT7
  Top 0.254: DDS7.5 53.5,12.29 53.5,9.77 53.77,9.5 CLOCK7.1
COMP
  Top 0.254: 49.21,166.62 C_DDS3.2 49.36,166.62 50.8,166.62 50.8,166.63 DDS.1
COMP1
  Top 0.254: 49.21,144.62 C_DDS1.2 49.36,144.62 50.8,144.62 50.8,144.63 DDS1.1
COMP2
  Top 0.254: 49.21,122.62 C_DDS5.2 49.36,122.62 50.8,122.62 50.8,122.63 DDS2.1
COMP3
  Top 0.254: 49.21,100.62 C_DDS7.2 49.36,100.62 50.8,100.62 50.8,100.63 DDS3.1
COMP4
  Top 0.254: 49.21,78.62 C_DDS9.2 49.36,78.62 50.8,78.62 50.8,78.63 DDS4.1
COMP5
  Top 0.254: 49.21,56.62 C_DDS11.2 49.36,56.62 50.8,56.62 50.8,56.63 DDS5.1
COMP6
  Top 0.254: 49.21,34.62 C_DDS13.2 49.36,34.62 50.8,34.62 50.8,34.63 DDS6.1
COMP7
  Top 0.254: 49.21,12.62 C_DDS15.2 49.36,12.62 50.8,12.62 50.8,12.63 DDS7.1
FSYNC
  Top 0.254: DIGITAL_ISO1.14 48.9,168.37 50.64,169.96 51.44,169.96 51.79,170.32 DDS.8
FSYNC1
  Top 0.254: DIGITAL_ISO2.14 48.9,146.37 50.64,147.96 51.44,147.96 51.79,148.32 DDS1.8
FSYNC2
  Top 0.254: DIGITAL_ISO3.14 48.9,124.37 50.64,125.96 51.44,125.96 51.79,126.32 DDS2.8
FSYNC3
  Top 0.254: DIGITAL_ISO4.14 48.9,102.37 50.64,103.96 51.44,103.96 51.79,104.32 DDS3.8
FSYNC4
  Top 0.254: DIGITAL_ISO5.14 48.9,80.37 50.64,81.96 51.44,81.96 51.79,82.32 DDS4.8
FSYNC5
  Top 0.254: DIGITAL_ISO6.14 48.9,58.37 50.64,59.96 51.44,59.96 51.79,60.32 DDS5.8
FSYNC6
  Top 0.254: DIGITAL_ISO7.14 48.9,36.37 50.64,37.96 51.44,37.96 51.79,38.32 DDS6.8
FSYNC7
  Top 0.254: DIGITAL_ISO8.14 48.9,14.37 50.64,15.96 51.44,15.96 51.79,16.32 DDS7.8
FSYNC_ARD  (via drill 0.4 pad 0.25)  (1 unrouted)
  Top 0.254: 8.57,93.22 10.64,93.22 | 10.64,93.22 U1.18 9.54,93.22 9.53,93.23 | U1.9 8.93,91.93 | 9.53,91.93 U1.16 | U1.11 9.59,90.63 | 9.59,90.63 U1.14 | U1.7 8.57,93.22 | 10.64,93.22 10.64,94.19 10.97,94.52 U1.20 10.3,94.5 9.83,95.33 8.76,95.33 8.16,94.52 U1.5 5.25,94.52 4.6,93.87 3.18,93.87 2.7,94.34 v2.7,156.31 | 9.59,90.63 9.59,91.86 9.53,91.93 | 9.53,91.93 8.93,91.93 | 8.93,91.93 8.57,92.28 8.57,93.22 | 8.72,181.55 8.73,181.53
  Bottom 0.254: v2.7,156.31 2.7,180.59 3.64,181.53 8.73,181.53
FSYNC_IN  (via drill 0.4, 0.4 pad 0.25)
  Top 0.254: DIGITAL_ISO1.3 29.85,168.37 v29.53,168.05 | U1.6 6.41,93.9 8.99,93.9 9.23,94.14 v9.23,94.26 | v13.75,95.09 13.98,95.45 13.98,100.67 12.68,101.62 12.68,155.06 17.54,159.45 v29.54,159.45
  Bottom 0.254: v9.23,94.26 10.06,95.09 v13.75,95.09 | v29.54,159.45 29.53,159.46 v29.53,168.05
FSYNC_IN1  (via drill 0.4, 0.4 pad 0.25)
  Top 0.254: DIGITAL_ISO2.3 29.85,146.37 v29.53,146.05 | 6.26,92.6 v4.72,92.6 | v13.63,138.43 v28.59,138.43
  Bottom 0.254: v29.53,146.05 29.53,139.37 v28.59,138.43 | v4.72,92.6 7.93,92.6 8.16,92.83 8.16,135.94 10.66,138.43 v13.63,138.43
FSYNC_IN2  (via drill 0.4, 0.4 pad 0.25)
  Top 0.254: DIGITAL_ISO3.3 29.85,124.37 v29.53,124.05 | 6.14,91.29 v3.77,91.29 | v6.62,102.93 9.47,105.78 v9.59,105.78 | v13.75,109.7 18.14,114.21 v27.28,114.21
  Bottom 0.254: v29.53,124.05 29.53,116.45 v27.28,114.21 | v3.77,91.29 2.23,92.83 2.23,100.79 4.36,102.93 v6.62,102.93 | v9.59,105.78 13.51,109.7 v13.75,109.7
FSYNC_IN3  (via drill 0.4, 0.4 pad 0.25)
  Top 0.254: DIGITAL_ISO4.3 29.85,102.37 v29.53,102.05 | 6.03,89.98 5.79,89.98 5.79,84.28 6.14,83.93 17.19,83.93 17.78,84.52 17.78,89.51 22.65,94.38 v27.88,94.38
  Bottom 0.254: v29.53,102.05 29.53,96.03 v27.88,94.38
FSYNC_IN4  (via drill 0.4, 0.4 pad 0.25)
  Top 0.254: DIGITAL_ISO5.3 29.85,80.37 v29.53,80.05 | 12.44,89.98 10.78,89.98 10.18,89.39 v10.18,89.27 | v10.18,73.12 11.25,72.05 v28.11,72.05
  Bottom 0.254: v29.53,80.05 29.53,73.47 v28.11,72.05 | v10.18,89.27 v10.18,73.12
FSYNC_IN5  (via drill 0.4, 0.4 pad 0.25)
  Top 0.254: DIGITAL_ISO6.3 29.85,58.37 v29.53,58.05 | 12.08,91.29 13.15,91.29 13.15,89.27 v12.56,88.68 | v11.13,51.63 12.68,50.08 27.76,50.08 29.54,51.87 v29.54,51.98
  Bottom 0.254: v29.53,58.05 29.53,54.36 29.53,53.61 29.53,52 v29.54,51.98 | v12.56,88.68 11.73,87.97 11.13,87.37 v11.13,51.63
FSYNC_IN6  (via drill 0.4, 0.4 pad 0.25)
  Top 0.254: DIGITAL_ISO7.3 29.85,36.37 v29.53,36.05 | 12.2,92.6 13.27,92.6 13.27,92 13.98,91.29 13.98,88.08 v12.91,87.02 | v12.2,28.12 12.68,27.64 v27.4,27.64
  Bottom 0.254: v29.53,36.05 29.53,29.77 v27.4,27.64 | v12.91,87.02 12.2,86.3 v12.2,28.12
FSYNC_IN7  (via drill 0.4, 0.4 pad 0.25)
  Top 0.254: DIGITAL_ISO8.3 29.85,14.37 v29.53,14.05 | 12.08,93.9 13.39,93.9 13.39,93.43 15.17,91.41 15.17,87.37 13.86,86.07 v13.86,85.83
  Bottom 0.254: v13.86,85.83 13.15,85.12 13.15,12.68 13.98,11.85 26.21,11.85 28.42,14.05 v29.53,14.05
GND  (via drill 0.4 pad 0.25, 0.6)  (56 unrouted)
  Top 0.254: U1.21 10.89,95.21 10.42,95.92 8.16,95.92 7.57,95.18 4.64,95.18 v3.97,95.14 | v36.67,180.28 37.31,180.75 U$1.GND@1 | U$1.GND@14 U$1.GND@16 33.81,173.45 32.54,173.45 | S1.1 25.4,164.02 v25.4,162.18 | C_ISO1A.2 31.1,169.64 v29.53,169.64 | C_ISO1A.2 C_ISO1B.2 | C_ISO1A.2 31.13,169.64 DIGITAL_ISO1.2 | v36.67,158.28 37.31,158.75 U$2.GND@1 | U$2.GND@14 U$2.GND@16 33.81,151.45 32.54,151.45 | S3.1 25.4,142.02 v25.4,140.18 | C_ISO1A1.2 31.1,147.64 v29.53,147.64 | C_ISO1A1.2 C_ISO1B1.2 | C_ISO1A1.2 31.13,147.64 DIGITAL_ISO2.2 | v36.67,136.28 37.31,136.75 U$3.GND@1 | U$3.GND@14 U$3.GND@16 33.81,129.45 32.54,129.45 | S5.1 25.4,120.02 v25.4,118.18 | C_ISO1A2.2 31.1,125.64 v29.53,125.64 | C_ISO1A2.2 C_ISO1B2.2 | C_ISO1A2.2 31.13,125.64 DIGITAL_ISO3.2 | v36.67,114.28 37.31,114.75 U$4.GND@1 | U$4.GND@14 U$4.GND@16 33.81,107.45 32.54,107.45 | S7.1 25.4,98.02 v25.4,96.18 | C_ISO1A3.2 31.1,103.64 v29.53,103.64 | C_ISO1A3.2 C_ISO1B3.2 | C_ISO1A3.2 31.13,103.64 DIGITAL_ISO4.2 | v36.67,92.28 37.31,92.75 U$5.GND@1 | U$5.GND@14 U$5.GND@16 33.81,85.45 32.54,85.45 | S9.1 25.4,76.02 v25.4,74.18 | C_ISO1A4.2 31.1,81.64 v29.53,81.64 | C_ISO1A4.2 C_ISO1B4.2 | C_ISO1A4.2 31.13,81.64 DIGITAL_ISO5.2 | v36.67,70.28 37.31,70.75 U$6.GND@1 | U$6.GND@14 U$6.GND@16 33.81,63.45 32.54,63.45 | S11.1 25.4,54.02 v25.4,52.18 | C_ISO1A5.2 31.1,59.64 v29.53,59.64 | C_ISO1A5.2 C_ISO1B5.2 | C_ISO1A5.2 31.13,59.64 DIGITAL_ISO6.2 | v36.67,48.28 37.31,48.75 U$7.GND@1 | U$7.GND@14 U$7.GND@16 33.81,41.45 32.54,41.45 | S13.1 25.4,32.02 v25.4,30.18 | C_ISO1A6.2 31.1,37.64 v29.53,37.64 | C_ISO1A6.2 C_ISO1B6.2 | C_ISO1A6.2 31.13,37.64 DIGITAL_ISO7.2 | v36.67,26.28 37.31,26.75 U$8.GND@1
  Top 0.254: U$8.GND@14 U$8.GND@16 33.81,19.45 32.54,19.45 | S15.1 25.4,10.02 v25.4,8.18 | C_ISO1A7.2 31.1,15.64 v29.53,15.64 | C_ISO1A7.2 C_ISO1B7.2 | C_ISO1A7.2 31.13,15.64 DIGITAL_ISO8.2
  Top 0.406: U$1.GND@7 U$1.GND@11 U$1.GND@10 | U$1.GND@10 U$1.GND@6 U$1.GND@7 | U$1.GND@7 U$1.GND@5 | U$1.GND@5 U$1.GND@4 | U$1.GND@4 U$1.GND@8 | U$1.GND@8 U$1.GND@12 | U$1.GND@12 U$1.GND@15 | U$1.GND@12 U$1.GND@13 | U$1.GND@10 U$1.GND@14 U$1.GND@13 | U$1.GND@10 U$1.GND@9 | U$1.GND@9 U$1.GND@8 | U$1.GND@9 U$1.GND@13 | U$1.GND@4 U$1.GND@3 U$1.GND@2 U$1.GND@1 | 34.34,169.63 DIGITAL_ISO1.2 | v32.23,163.29 DIGITAL_ISO1.7 DIGITAL_ISO1.8 | U$1.GND@9 U$1.GND@5 | U$2.GND@7 U$2.GND@11 U$2.GND@10 | U$2.GND@10 U$2.GND@6 U$2.GND@7 | U$2.GND@7 U$2.GND@5 | U$2.GND@5 U$2.GND@4 | U$2.GND@4 U$2.GND@8 | U$2.GND@8 U$2.GND@12 | U$2.GND@12 U$2.GND@15 | U$2.GND@12 U$2.GND@13 | U$2.GND@10 U$2.GND@14 U$2.GND@13 | U$2.GND@10 U$2.GND@9 | U$2.GND@9 U$2.GND@8 | U$2.GND@9 U$2.GND@13 | U$2.GND@4 U$2.GND@3 U$2.GND@2 U$2.GND@1 | 34.34,147.63 DIGITAL_ISO2.2 | v32.23,141.29 DIGITAL_ISO2.7 DIGITAL_ISO2.8 | U$2.GND@9 U$2.GND@5 | U$3.GND@7 U$3.GND@11 U$3.GND@10 | U$3.GND@10 U$3.GND@6 U$3.GND@7 | U$3.GND@7 U$3.GND@5 | U$3.GND@5 U$3.GND@4 | U$3.GND@4 U$3.GND@8 | U$3.GND@8 U$3.GND@12 | U$3.GND@12 U$3.GND@15 | U$3.GND@12 U$3.GND@13 | U$3.GND@10 U$3.GND@14 U$3.GND@13 | U$3.GND@10 U$3.GND@9 | U$3.GND@9 U$3.GND@8 | U$3.GND@9 U$3.GND@13 | U$3.GND@4 U$3.GND@3 U$3.GND@2 U$3.GND@1 | 34.34,125.63 DIGITAL_ISO3.2 | v32.23,119.29 DIGITAL_ISO3.7 DIGITAL_ISO3.8 | U$3.GND@9 U$3.GND@5 | U$4.GND@7 U$4.GND@11 U$4.GND@10 | U$4.GND@10 U$4.GND@6 U$4.GND@7 | U$4.GND@7 U$4.GND@5 | U$4.GND@5 U$4.GND@4 | U$4.GND@4 U$4.GND@8 | U$4.GND@8 U$4.GND@12 | U$4.GND@12 U$4.GND@15 | U$4.GND@12 U$4.GND@13 | U$4.GND@10 U$4.GND@14 U$4.GND@13 | U$4.GND@10 U$4.GND@9 | U$4.GND@9 U$4.GND@8 | U$4.GND@9 U$4.GND@13 | U$4.GND@4 U$4.GND@3 U$4.GND@2 U$4.GND@1
  Top 0.406: 34.34,103.63 DIGITAL_ISO4.2 | v32.23,97.29 DIGITAL_ISO4.7 DIGITAL_ISO4.8 | U$4.GND@9 U$4.GND@5 | U$5.GND@7 U$5.GND@11 U$5.GND@10 | U$5.GND@10 U$5.GND@6 U$5.GND@7 | U$5.GND@7 U$5.GND@5 | U$5.GND@5 U$5.GND@4 | U$5.GND@4 U$5.GND@8 | U$5.GND@8 U$5.GND@12 | U$5.GND@12 U$5.GND@15 | U$5.GND@12 U$5.GND@13 | U$5.GND@10 U$5.GND@14 U$5.GND@13 | U$5.GND@10 U$5.GND@9 | U$5.GND@9 U$5.GND@8 | U$5.GND@9 U$5.GND@13 | U$5.GND@4 U$5.GND@3 U$5.GND@2 U$5.GND@1 | 34.34,81.63 DIGITAL_ISO5.2 | v32.23,75.29 DIGITAL_ISO5.7 DIGITAL_ISO5.8 | U$5.GND@9 U$5.GND@5 | U$6.GND@7 U$6.GND@11 U$6.GND@10 | U$6.GND@10 U$6.GND@6 U$6.GND@7 | U$6.GND@7 U$6.GND@5 | U$6.GND@5 U$6.GND@4 | U$6.GND@4 U$6.GND@8 | U$6.GND@8 U$6.GND@12 | U$6.GND@12 U$6.GND@15 | U$6.GND@12 U$6.GND@13 | U$6.GND@10 U$6.GND@14 U$6.GND@13 | U$6.GND@10 U$6.GND@9 | U$6.GND@9 U$6.GND@8 | U$6.GND@9 U$6.GND@13 | U$6.GND@4 U$6.GND@3 U$6.GND@2 U$6.GND@1 | 34.34,59.63 DIGITAL_ISO6.2 | v32.23,53.29 DIGITAL_ISO6.7 DIGITAL_ISO6.8 | U$6.GND@9 U$6.GND@5 | U$7.GND@7 U$7.GND@11 U$7.GND@10 | U$7.GND@10 U$7.GND@6 U$7.GND@7 | U$7.GND@7 U$7.GND@5 | U$7.GND@5 U$7.GND@4 | U$7.GND@4 U$7.GND@8 | U$7.GND@8 U$7.GND@12 | U$7.GND@12 U$7.GND@15 | U$7.GND@12 U$7.GND@13 | U$7.GND@10 U$7.GND@14 U$7.GND@13 | U$7.GND@10 U$7.GND@9 | U$7.GND@9 U$7.GND@8 | U$7.GND@9 U$7.GND@13 | U$7.GND@4 U$7.GND@3 U$7.GND@2 U$7.GND@1 | 34.34,37.63 DIGITAL_ISO7.2 | v32.23,31.29 DIGITAL_ISO7.7 DIGITAL_ISO7.8 | U$7.GND@9 U$7.GND@5 | U$8.GND@7 U$8.GND@11 U$8.GND@10 | U$8.GND@10 U$8.GND@6 U$8.GND@7 | U$8.GND@7 U$8.GND@5 | U$8.GND@5 U$8.GND@4 | U$8.GND@4 U$8.GND@8 | U$8.GND@8 U$8.GND@12 | U$8.GND@12 U$8.GND@15 | U$8.GND@12 U$8.GND@13 | U$8.GND@10 U$8.GND@14 U$8.GND@13 | U$8.GND@10 U$8.GND@9
  Top 0.406: U$8.GND@9 U$8.GND@8 | U$8.GND@9 U$8.GND@13 | U$8.GND@4 U$8.GND@3 U$8.GND@2 U$8.GND@1 | 34.34,15.63 DIGITAL_ISO8.2 | v32.23,9.29 DIGITAL_ISO8.7 DIGITAL_ISO8.8 | U$8.GND@9 U$8.GND@5
  Gnd 0.254: v29.53,169.64 27.78,169.64 | v37.94,171.7 37.94,171.39 | v32.38,173.45 32.07,173.45 | v25.4,162.18 25.24,161.39 | v29.53,147.64 27.78,147.64 | v37.94,149.7 37.94,149.39 | v32.38,151.45 32.07,151.45 | v25.4,140.18 25.24,139.39 | v29.53,125.64 27.78,125.64 | v37.94,127.7 37.94,127.39 | v32.38,129.45 32.07,129.45 | v25.4,118.18 25.24,117.39 | v29.53,103.64 27.78,103.64 | v37.94,105.7 37.94,105.39 | v32.38,107.45 32.07,107.45 | v25.4,96.18 25.24,95.39 | v29.53,81.64 27.78,81.64 | v37.94,83.7 37.94,83.39 | v32.38,85.45 32.07,85.45 | v25.4,74.18 25.24,73.39 | v29.53,59.64 27.78,59.64 | v37.94,61.7 37.94,61.39 | v32.38,63.45 32.07,63.45 | v25.4,52.18 25.24,51.39 | v29.53,37.64 27.78,37.64 | v37.94,39.7 37.94,39.39 | v32.38,41.45 32.07,41.45 | v25.4,30.18 25.24,29.39 | v29.53,15.64 27.78,15.64 | v37.94,17.7 37.94,17.39 | v32.38,19.45 32.07,19.45 | v25.4,8.18 25.24,7.39
  Gnd 0.406: 26.35,171.07 26.35,170.43 | 26.35,149.07 26.35,148.43 | 26.35,127.07 26.35,126.43 | 26.35,105.07 26.35,104.43 | 26.35,83.07 26.35,82.43 | 26.35,61.07 26.35,60.43 | 26.35,39.07 26.35,38.43 | 26.35,17.07 26.35,16.43
  Bottom 0.254: C_IN.2 v36.67,180.28 | R_ADJ1.1 U$1.GND@7 v37.94,171.7 | C_BIAS.2 v32.38,173.45 | C_IN1.2 v36.67,158.28 | R_ADJ3.1 U$2.GND@7 v37.94,149.7 | C_BIAS1.2 v32.38,151.45 | C_IN2.2 v36.67,136.28 | R_ADJ5.1 U$3.GND@7 v37.94,127.7 | C_BIAS2.2 v32.38,129.45 | C_IN3.2 v36.67,114.28 | R_ADJ7.1 U$4.GND@7 v37.94,105.7 | C_BIAS3.2 v32.38,107.45 | C_IN4.2 v36.67,92.28 | R_ADJ9.1 U$5.GND@7 v37.94,83.7 | C_BIAS4.2 v32.38,85.45 | C_IN5.2 v36.67,70.28 | R_ADJ11.1 U$6.GND@7 v37.94,61.7 | C_BIAS5.2 v32.38,63.45 | C_IN6.2 v36.67,48.28 | R_ADJ13.1 U$7.GND@7 v37.94,39.7 | C_BIAS6.2 v32.38,41.45 | C_IN7.2 v36.67,26.28 | R_ADJ15.1 U$8.GND@7 v37.94,17.7 | C_BIAS7.2 v32.38,19.45
  pour Gnd: 38.58,195.83 0.53,195.83 0.53,195.81 0.36,195.83 -3.99,-15.56 38.58,-0.6
GND_CS  (via drill 0.4, 0.4 pad 0.25, 0.6)  (9 unrouted)
  Top 0.254: 45.88,174.88 C_OUT1.1 v45.88,176.94 | R_SET.1 61.54,163.93 60.64,163.93 60.33,163.61 59.79,163.61 CLOCK.3 CLOCK.2 58.74,164.08 58.28,164.55 C_CLK_BYP.2 56.21,164.4 v54.45,164.4 C_DDS4.1 | DDS.4 52.3,165.46 C_DDS_BYP1.2 C_DDS_BYP2.2 52.4,162.64 v52.55,162.5 | v78.58,176.94 78.25,176.93 OP_AMP_BYP_2.2 OP_AMP_BYP1.2 75.71,176.94 74.45,176.94 | OPAMP.4 74.47,176.93 74.45,176.94 | 74.45,176.94 73.66,177.74 71.02,177.74 R_H3.1 | C_OUT2.1 46.83,177.9 46.35,177.42 45.88,177.42 v45.88,176.94 | 44.45,162.02 v45.56,162.02 | DDS.9 51.28,171.47 51.28,170.59 51.12,170.43 50.01,170.43 49.69,170.75 v49.69,171.55 | LED1.C 64.41,162.34 v62.87,162.34 | v48.58,169.64 48.56,169.63 C_ISO2A.2 C_ISO2B.2 44.31,169.63 | R_ADJ2.2 45.88,177.36 v45.88,176.94
  Top 0.406: U$1.VOUT-@2 U$1.VOUT-@1 U$1.VOUT-@4 | U$1.VOUT-@2 U$1.VOUT-@3 U$1.VOUT-@6 | U$1.VOUT-@6 U$1.VOUT-@9 U$1.VOUT-@8 U$1.VOUT-@7 U$1.VOUT-@4 | U$1.VOUT-@4 U$1.VOUT-@5 | U$1.VOUT-@6 U$1.VOUT-@5 | U$1.VOUT-@5 U$1.VOUT-@2 | DIGITAL_ISO1.9 44.45,162.02 | 44.31,169.63 44.29,169.64 DIGITAL_ISO1.15 | C_ISO2A.2 47.29,169.63
  Top 0.61: U$1.VOUT-@4 v44.29,176.94 v45.88,176.94
  Gnd 0.254: v78.58,176.94 67.63,178.05 | v45.56,162.02 46.35,162.02 | v49.69,171.55 49.69,172.02 | v62.87,162.34 62.39,162.34
  Gnd 0.406: 40.32,166.31 40.32,165.83
  other vias: 70.8,179.64
  pour Gnd: 39.53,181.55 39.53,161.07 67.79,161.07 67.79,169.8 54.29,169.8 54.29,171.55 79.38,171.55 79.38,181.55
GND_CS1  (via drill 0.4, 0.4 pad 0.25, 0.6)  (9 unrouted)
  Top 0.254: 45.88,152.88 C_OUT3.1 v45.88,154.94 | R_SET1.1 61.54,141.93 60.64,141.93 60.33,141.61 59.79,141.61 CLOCK1.3 CLOCK1.2 58.74,142.08 58.28,142.55 C_CLK_BYP1.2 56.21,142.4 v54.45,142.4 C_DDS2.1 | DDS1.4 52.3,143.46 C_DDS_BYP5.2 C_DDS_BYP6.2 52.4,140.64 v52.55,140.5 | v78.58,154.94 78.25,154.93 OP_AMP_BYP_4.2 OP_AMP_BYP_3.2 75.71,154.94 74.45,154.94 | OPAMP1.4 74.47,154.93 74.45,154.94 | 74.45,154.94 73.66,155.74 71.02,155.74 R_H1.1 | C_OUT4.1 46.83,155.9 46.35,155.42 45.88,155.42 v45.88,154.94 | 44.45,140.02 v45.56,140.02 | DDS1.9 51.28,149.47 51.28,148.59 51.12,148.43 50.01,148.43 49.69,148.75 v49.69,149.55 | LED2.C 64.41,140.34 v62.87,140.34 | v48.58,147.64 48.56,147.63 C_ISO2A1.2 C_ISO2B1.2 44.31,147.63 | R_ADJ4.2 45.88,155.36 v45.88,154.94
  Top 0.406: U$2.VOUT-@2 U$2.VOUT-@1 U$2.VOUT-@4 | U$2.VOUT-@2 U$2.VOUT-@3 U$2.VOUT-@6 | U$2.VOUT-@6 U$2.VOUT-@9 U$2.VOUT-@8 U$2.VOUT-@7 U$2.VOUT-@4 | U$2.VOUT-@4 U$2.VOUT-@5 | U$2.VOUT-@6 U$2.VOUT-@5 | U$2.VOUT-@5 U$2.VOUT-@2 | DIGITAL_ISO2.9 44.45,140.02 | 44.31,147.63 44.29,147.64 DIGITAL_ISO2.15 | C_ISO2A1.2 47.29,147.63
  Top 0.61: U$2.VOUT-@4 v44.29,154.94 v45.88,154.94
  Gnd 0.254: v78.58,154.94 67.63,156.05 | v45.56,140.02 46.35,140.02 | v49.69,149.55 49.69,150.02 | v62.87,140.34 62.39,140.34
  Gnd 0.406: 40.32,144.31 40.32,143.83
  other vias: 70.8,157.64
  pour Gnd: 39.53,159.55 39.53,139.07 67.79,139.07 67.79,147.8 54.29,147.8 54.29,149.55 79.38,149.55 79.38,159.55
GND_CS2  (via drill 0.4, 0.4 pad 0.25, 0.6)  (9 unrouted)
  Top 0.254: 45.88,130.88 C_OUT5.1 v45.88,132.94 | R_SET2.1 61.54,119.93 60.64,119.93 60.33,119.61 59.79,119.61 CLOCK2.3 CLOCK2.2 58.74,120.08 58.28,120.55 C_CLK_BYP2.2 56.21,120.4 v54.45,120.4 C_DDS6.1 | DDS2.4 52.3,121.46 C_DDS_BYP9.2 C_DDS_BYP10.2 52.4,118.64 v52.55,118.5 | v78.58,132.94 78.25,132.93 OP_AMP_BYP_6.2 OP_AMP_BYP_5.2 75.71,132.94 74.45,132.94 | OPAMP2.4 74.47,132.93 74.45,132.94 | 74.45,132.94 73.66,133.74 71.02,133.74 R_H2.1 | C_OUT6.1 46.83,133.9 46.35,133.42 45.88,133.42 v45.88,132.94 | 44.45,118.02 v45.56,118.02 | DDS2.9 51.28,127.47 51.28,126.59 51.12,126.43 50.01,126.43 49.69,126.75 v49.69,127.55 | LED3.C 64.41,118.34 v62.87,118.34 | v48.58,125.64 48.56,125.63 C_ISO2A2.2 C_ISO2B2.2 44.31,125.63 | R_ADJ6.2 45.88,133.36 v45.88,132.94
  Top 0.406: U$3.VOUT-@2 U$3.VOUT-@1 U$3.VOUT-@4 | U$3.VOUT-@2 U$3.VOUT-@3 U$3.VOUT-@6 | U$3.VOUT-@6 U$3.VOUT-@9 U$3.VOUT-@8 U$3.VOUT-@7 U$3.VOUT-@4 | U$3.VOUT-@4 U$3.VOUT-@5 | U$3.VOUT-@6 U$3.VOUT-@5 | U$3.VOUT-@5 U$3.VOUT-@2 | DIGITAL_ISO3.9 44.45,118.02 | 44.31,125.63 44.29,125.64 DIGITAL_ISO3.15 | C_ISO2A2.2 47.29,125.63
  Top 0.61: U$3.VOUT-@4 v44.29,132.94 v45.88,132.94
  Gnd 0.254: v78.58,132.94 67.63,134.05 | v45.56,118.02 46.35,118.02 | v49.69,127.55 49.69,128.02 | v62.87,118.34 62.39,118.34
  Gnd 0.406: 40.32,122.31 40.32,121.83
  other vias: 70.8,135.64
  pour Gnd: 39.53,137.55 39.53,117.07 67.79,117.07 67.79,125.8 54.29,125.8 54.29,127.55 79.38,127.55 79.38,137.55
GND_CS3  (via drill 0.4, 0.4 pad 0.25, 0.6)  (9 unrouted)
  Top 0.254: 45.88,108.88 C_OUT7.1 v45.88,110.94 | R_SET3.1 61.54,97.93 60.64,97.93 60.33,97.61 59.79,97.61 CLOCK3.3 CLOCK3.2 58.74,98.08 58.28,98.55 C_CLK_BYP3.2 56.21,98.4 v54.45,98.4 C_DDS8.1 | DDS3.4 52.3,99.46 C_DDS_BYP13.2 C_DDS_BYP14.2 52.4,96.64 v52.55,96.5 | v78.58,110.94 78.25,110.93 OP_AMP_BYP_8.2 OP_AMP_BYP_7.2 75.71,110.94 74.45,110.94 | OPAMP3.4 74.47,110.93 74.45,110.94 | 74.45,110.94 73.66,111.74 71.02,111.74 R_H4.1 | C_OUT8.1 46.83,111.9 46.35,111.42 45.88,111.42 v45.88,110.94 | 44.45,96.02 v45.56,96.02 | DDS3.9 51.28,105.47 51.28,104.59 51.12,104.43 50.01,104.43 49.69,104.75 v49.69,105.55 | LED4.C 64.41,96.34 v62.87,96.34 | v48.58,103.64 48.56,103.63 C_ISO2A3.2 C_ISO2B3.2 44.31,103.63 | R_ADJ8.2 45.88,111.36 v45.88,110.94
  Top 0.406: U$4.VOUT-@2 U$4.VOUT-@1 U$4.VOUT-@4 | U$4.VOUT-@2 U$4.VOUT-@3 U$4.VOUT-@6 | U$4.VOUT-@6 U$4.VOUT-@9 U$4.VOUT-@8 U$4.VOUT-@7 U$4.VOUT-@4 | U$4.VOUT-@4 U$4.VOUT-@5 | U$4.VOUT-@6 U$4.VOUT-@5 | U$4.VOUT-@5 U$4.VOUT-@2 | DIGITAL_ISO4.9 44.45,96.02 | 44.31,103.63 44.29,103.64 DIGITAL_ISO4.15 | C_ISO2A3.2 47.29,103.63
  Top 0.61: U$4.VOUT-@4 v44.29,110.94 v45.88,110.94
  Gnd 0.254: v78.58,110.94 67.63,112.05 | v45.56,96.02 46.35,96.02 | v49.69,105.55 49.69,106.02 | v62.87,96.34 62.39,96.34
  Gnd 0.406: 40.32,100.31 40.32,99.83
  other vias: 70.8,113.64
  pour Gnd: 39.53,115.55 39.53,95.07 67.79,95.07 67.79,103.8 54.29,103.8 54.29,105.55 79.38,105.55 79.38,115.55
GND_CS4  (via drill 0.4, 0.4 pad 0.25, 0.6)  (9 unrouted)